# Altium PCB Motor Controller.PcbDoc (part 1 of 2)
Units mil, origin at the board's own origin, x right, y up, seen from the top; angles counter-clockwise.
Board outline 1811.02 x 1811.02 mil, 4 copper layers (Top Layer, Mid-Layer 1, Mid-Layer 2, Bottom Layer); 65 components, 62 nets, 262 pads, 173 vias.
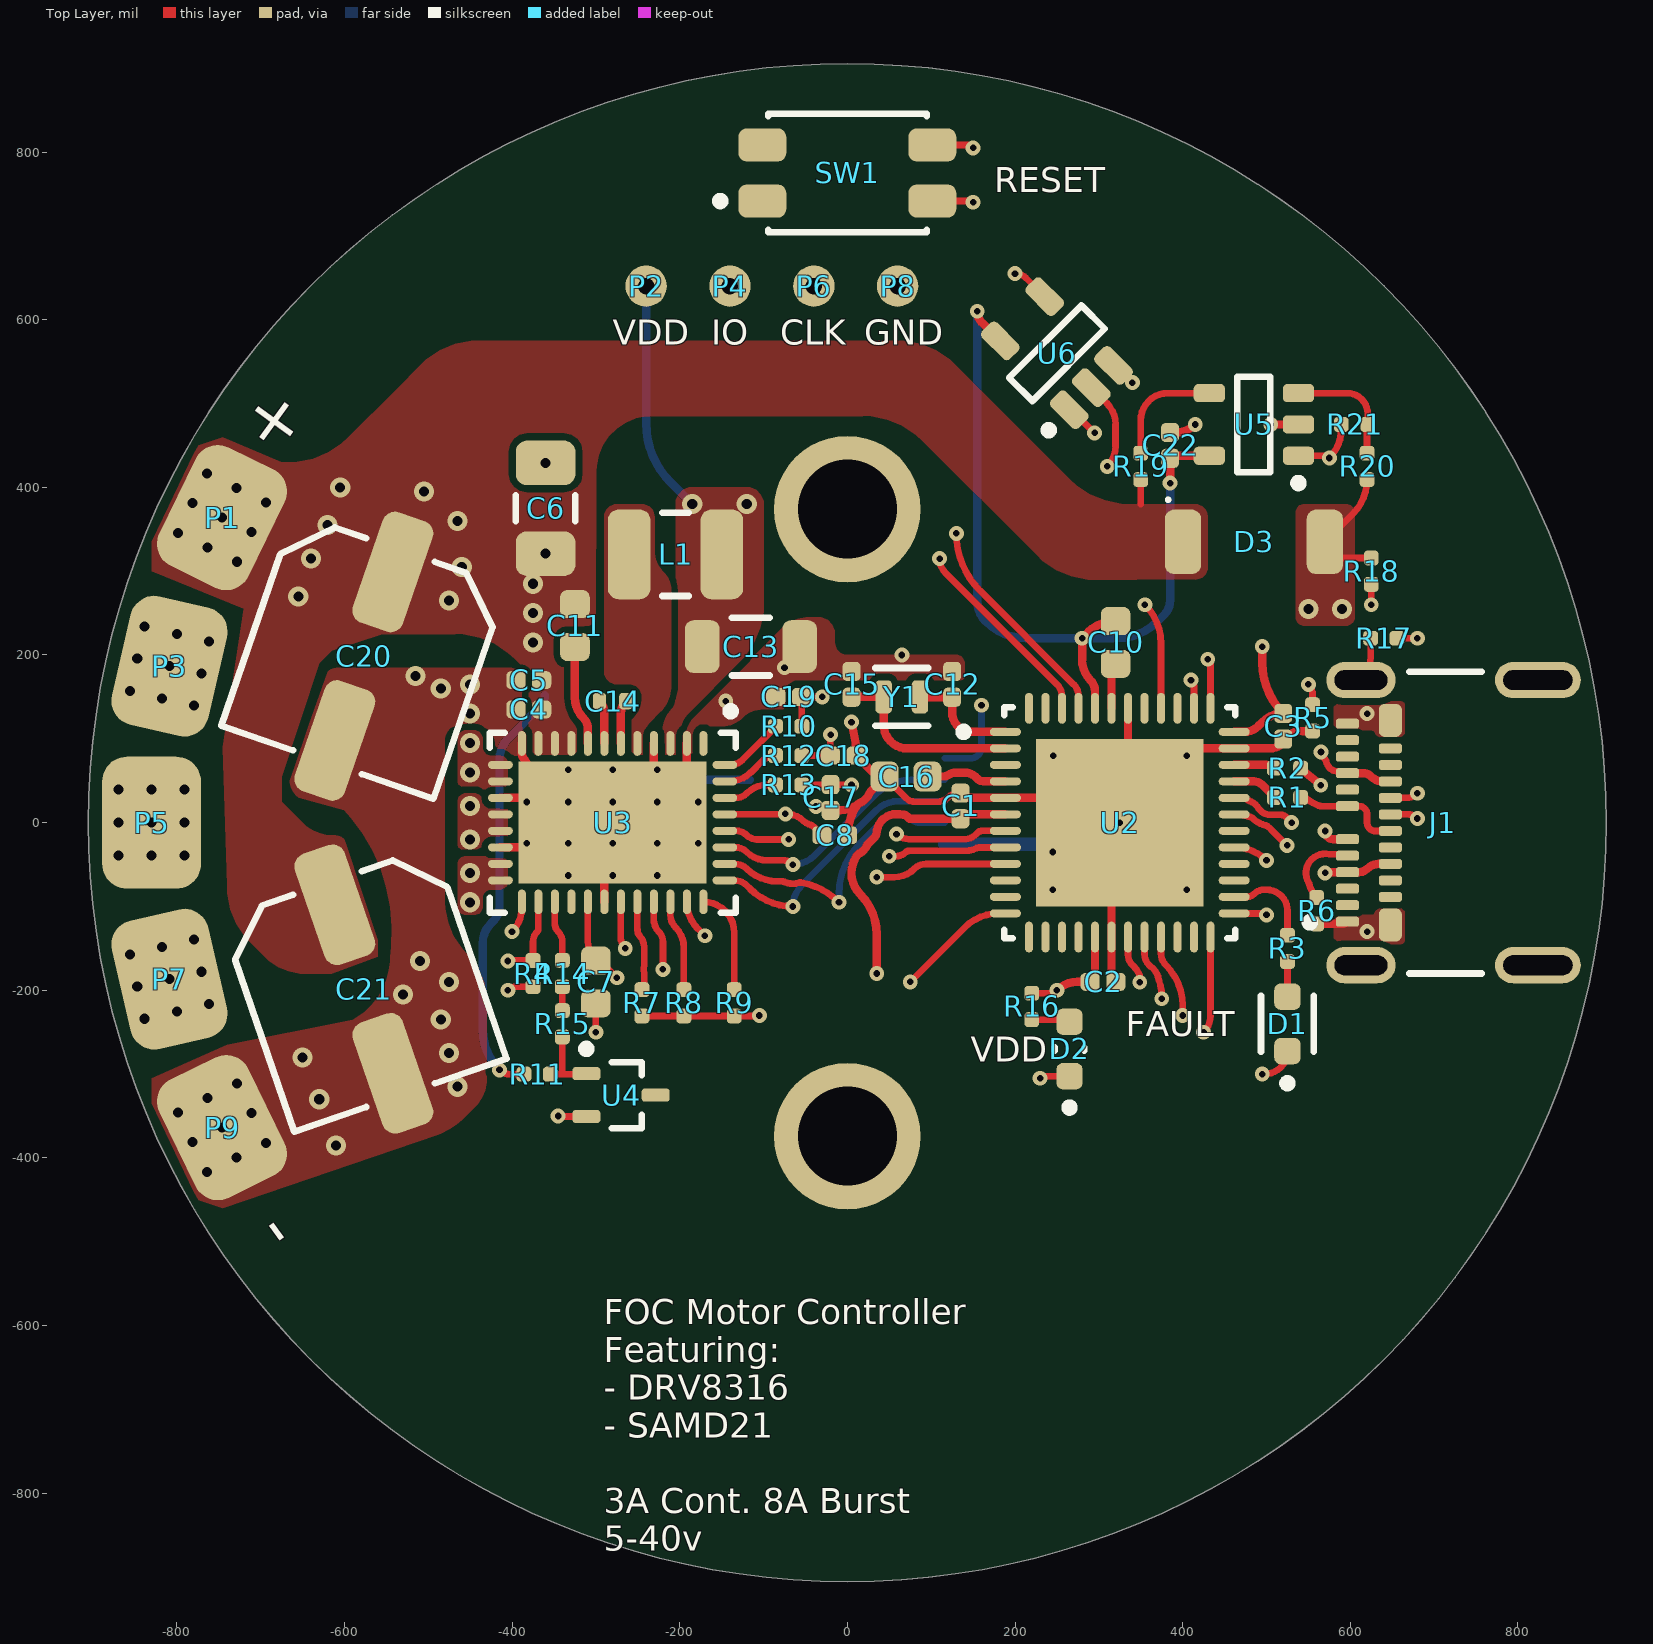
[diagram p0: Top Layer view]
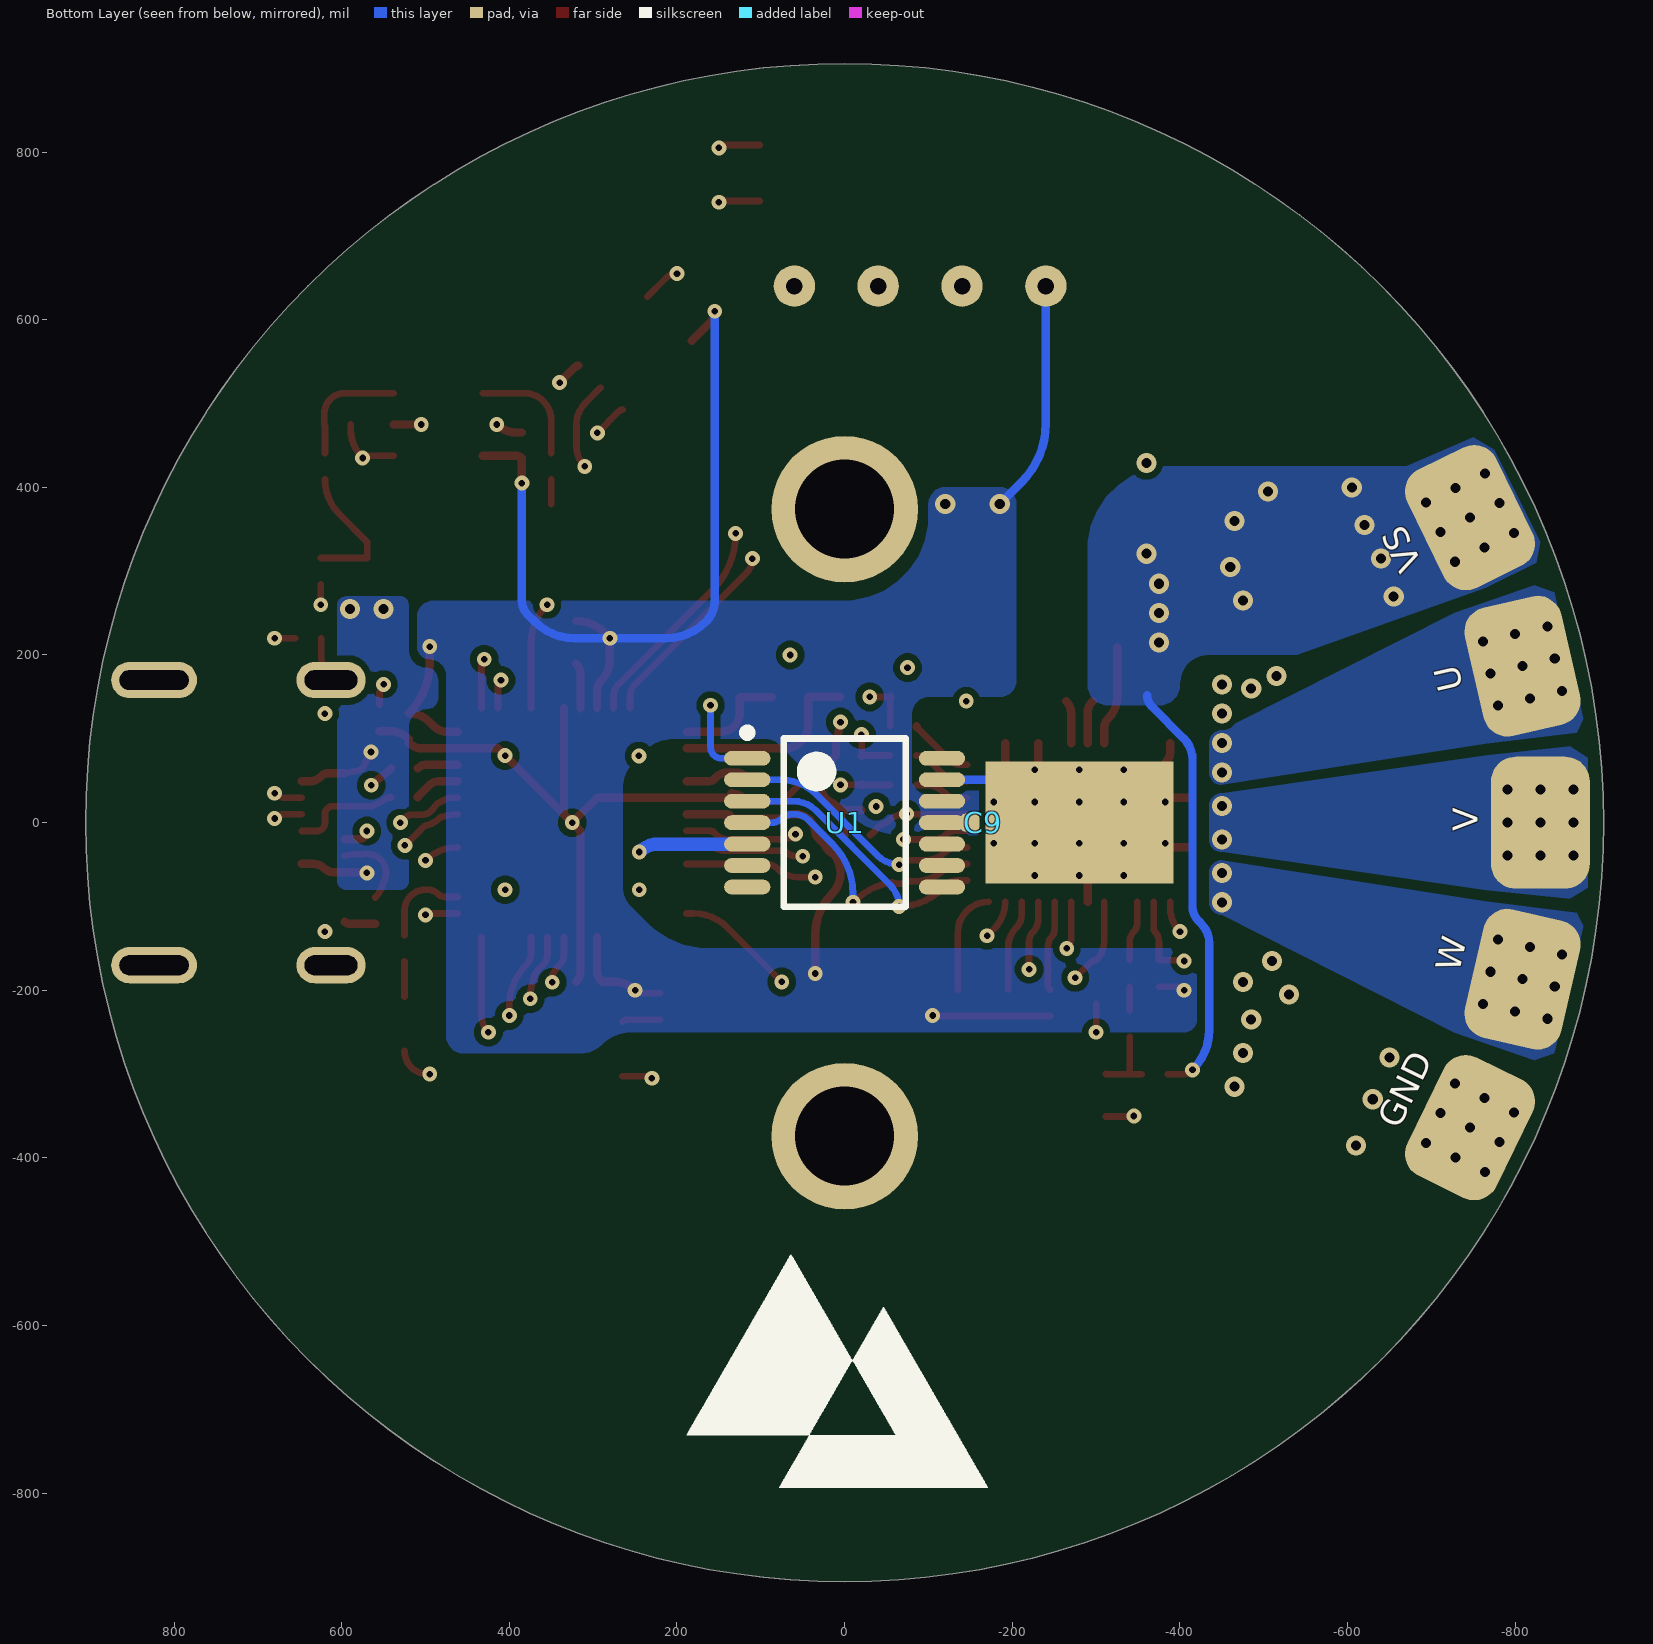
[diagram p1: Bottom Layer view, seen from below]
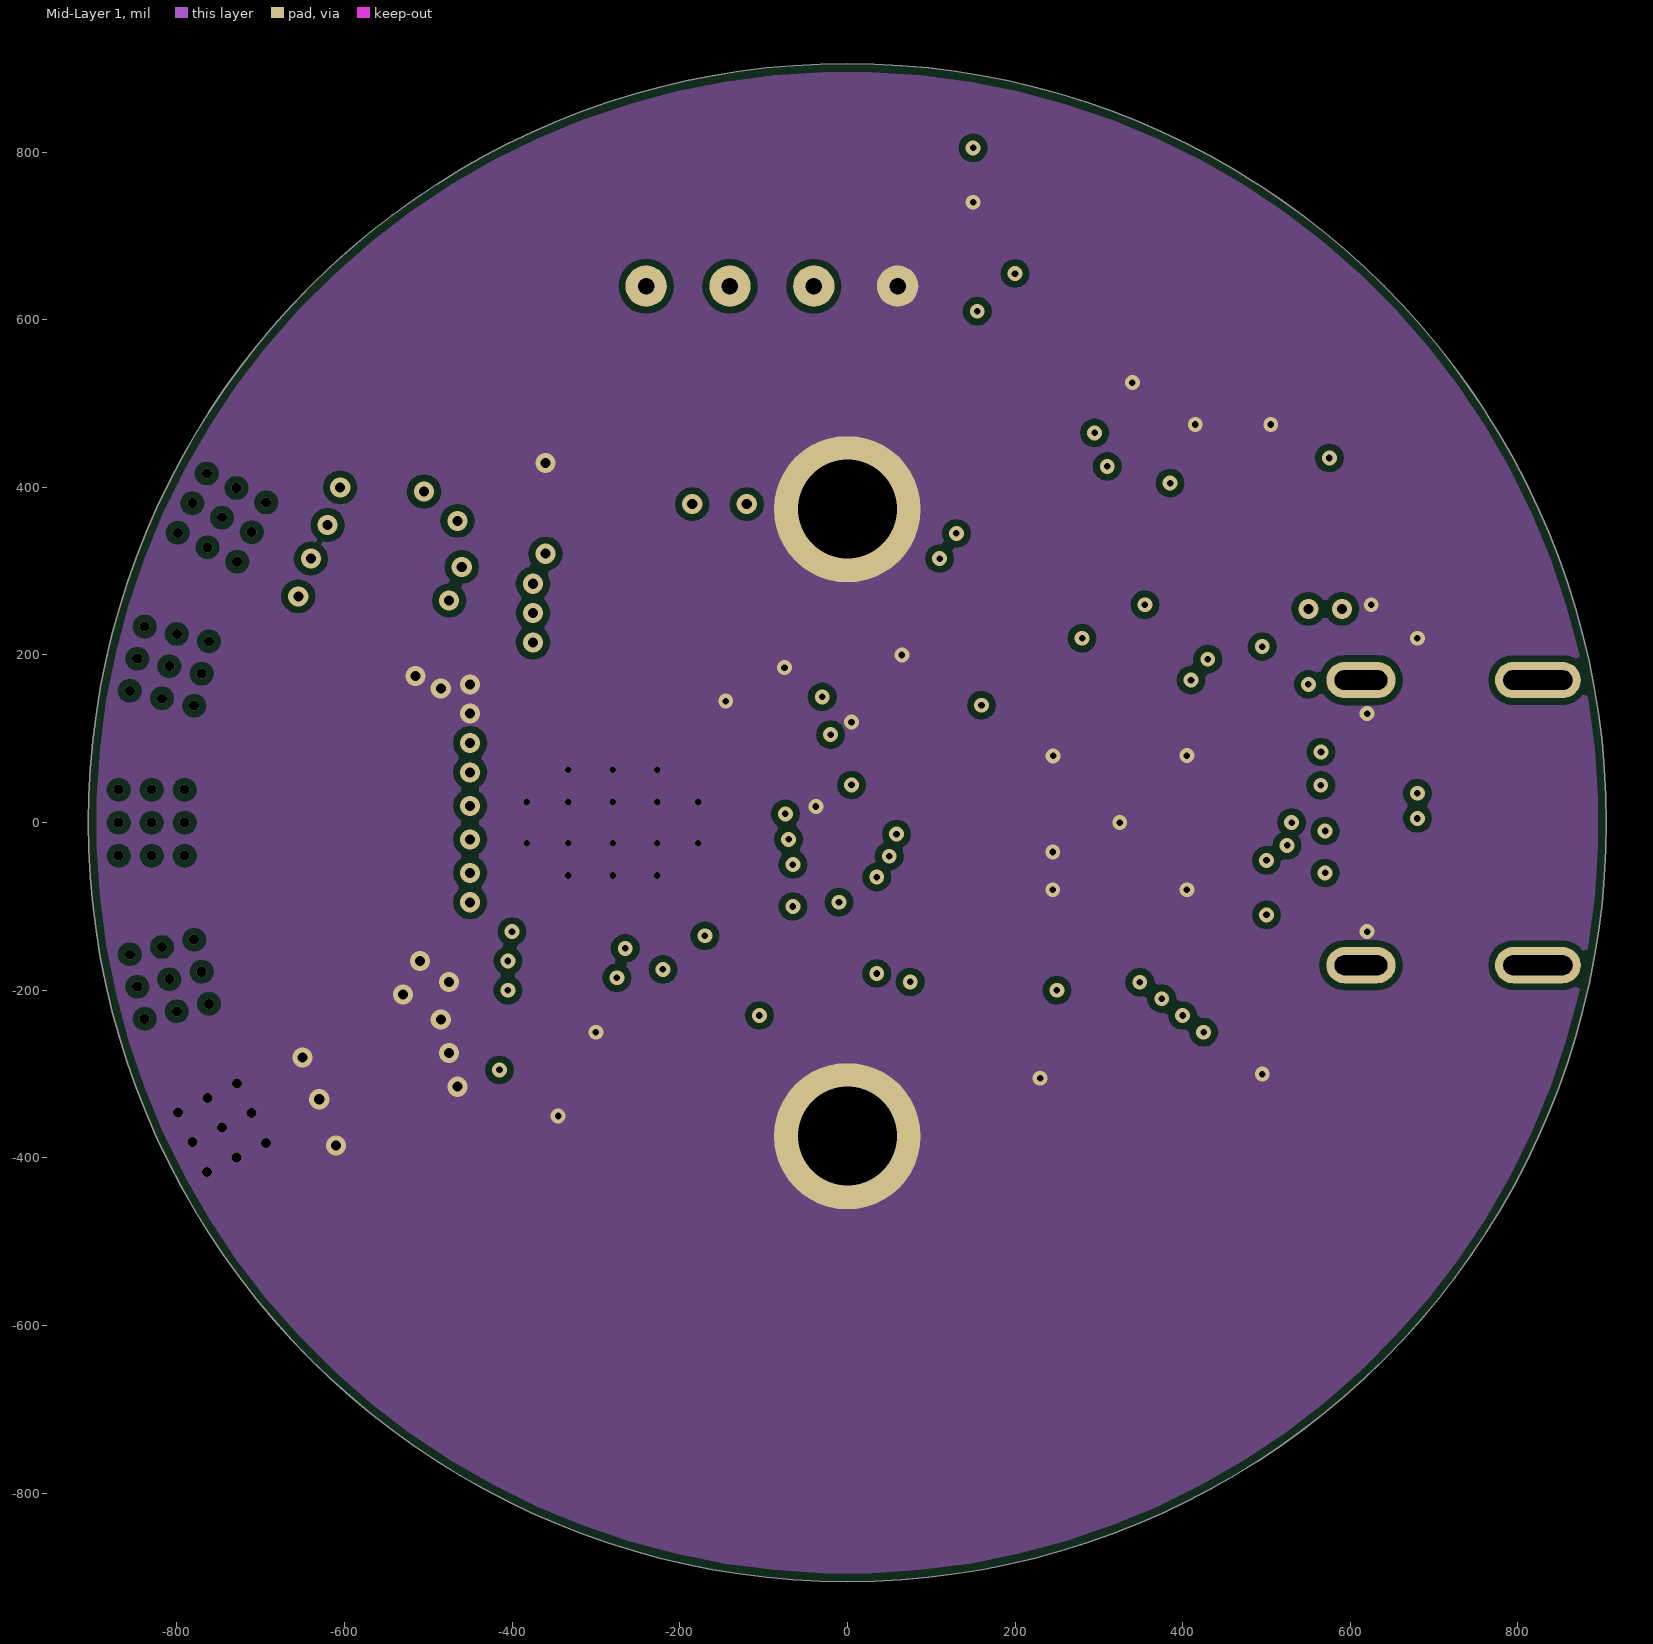
[diagram p2: Mid-Layer 1]
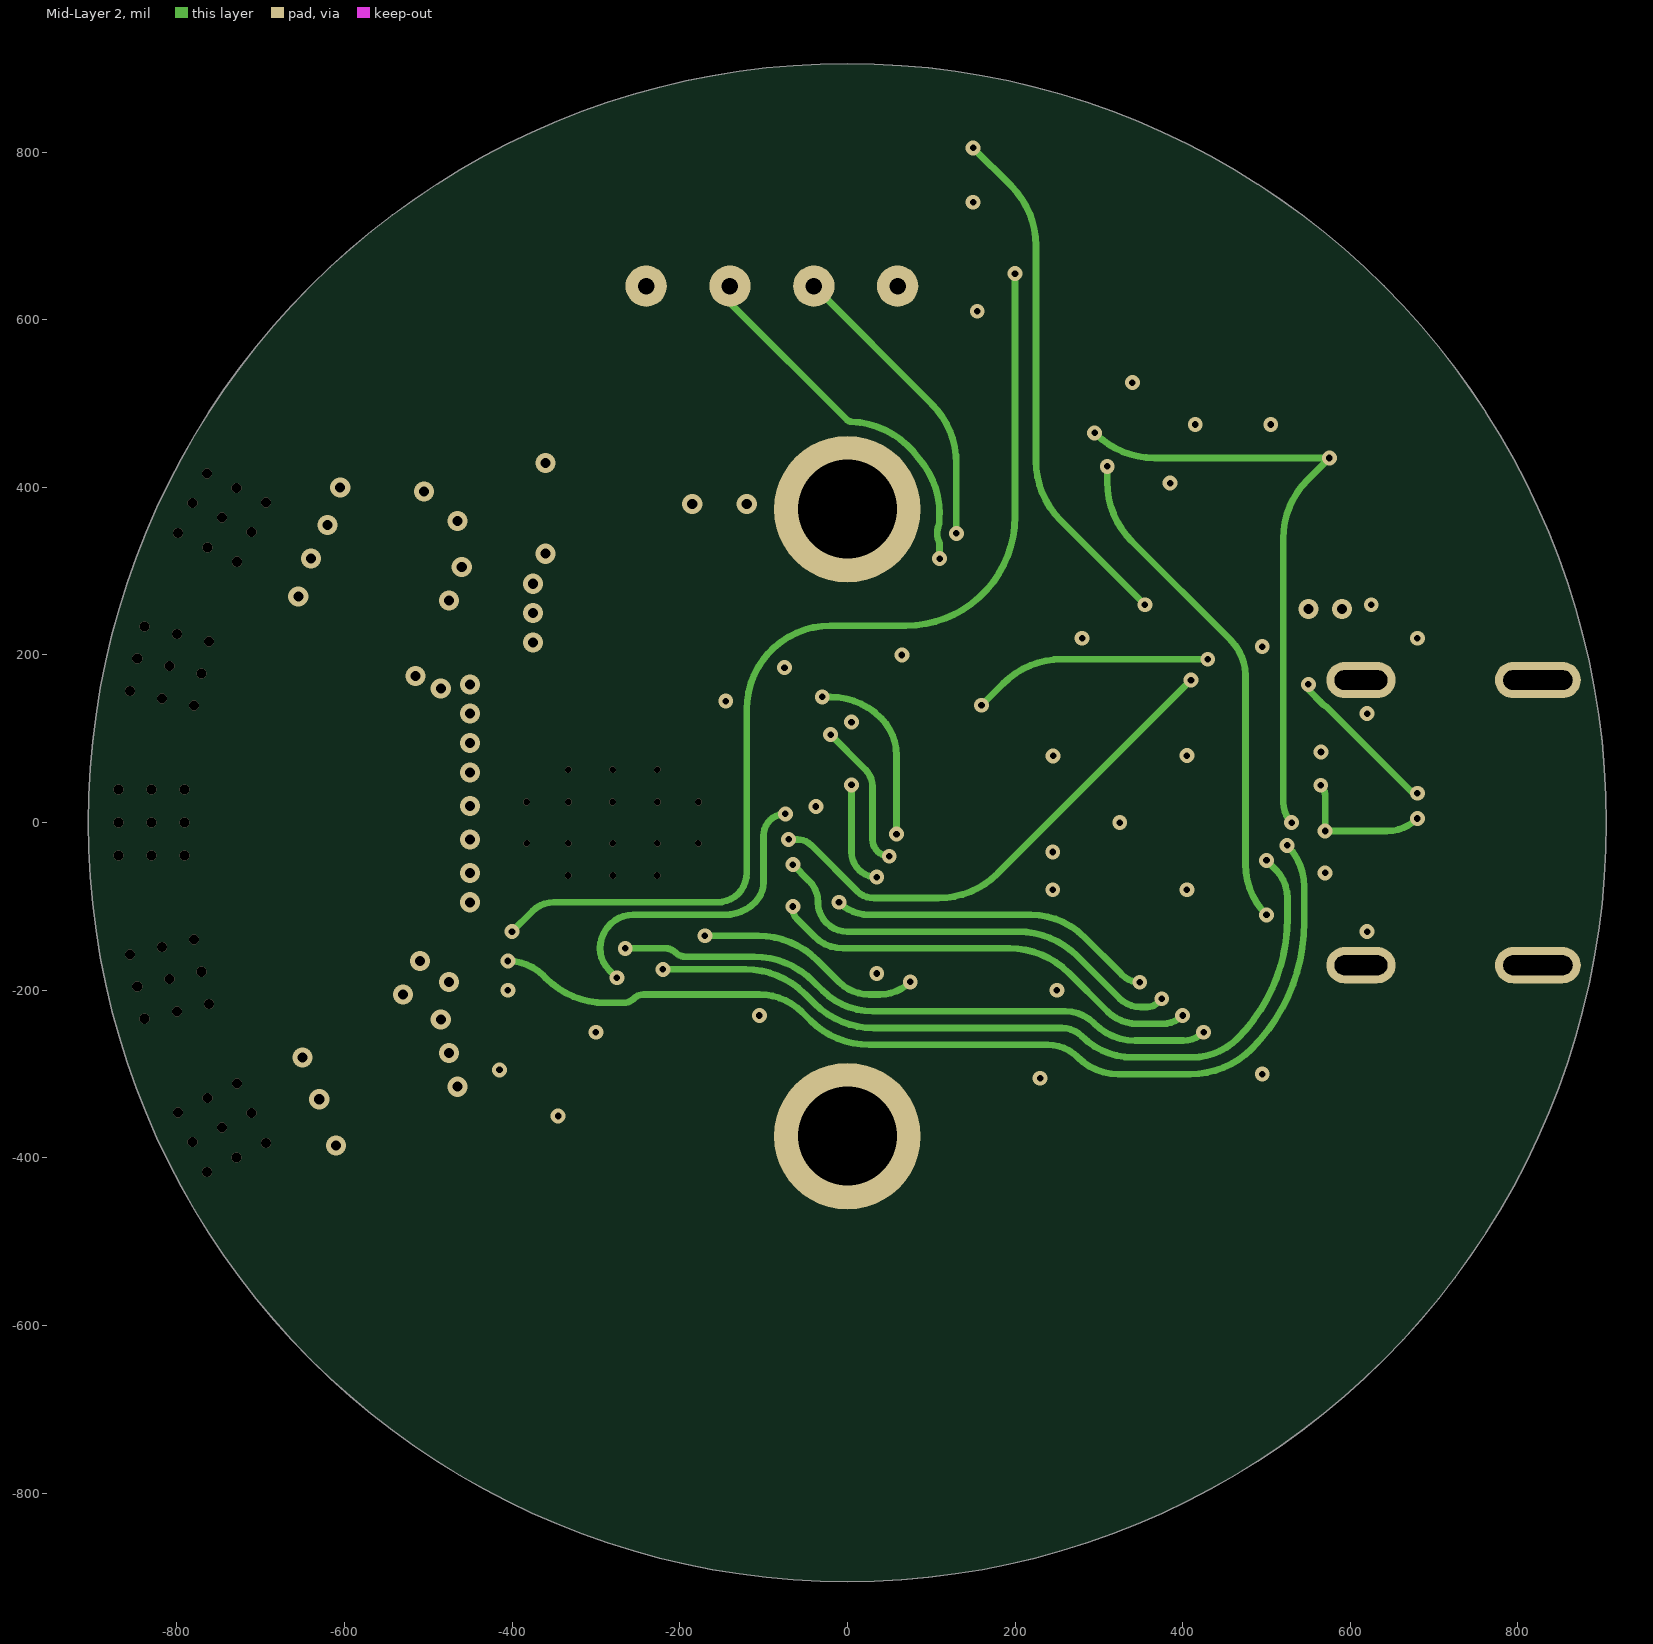
[diagram p3: Mid-Layer 2]
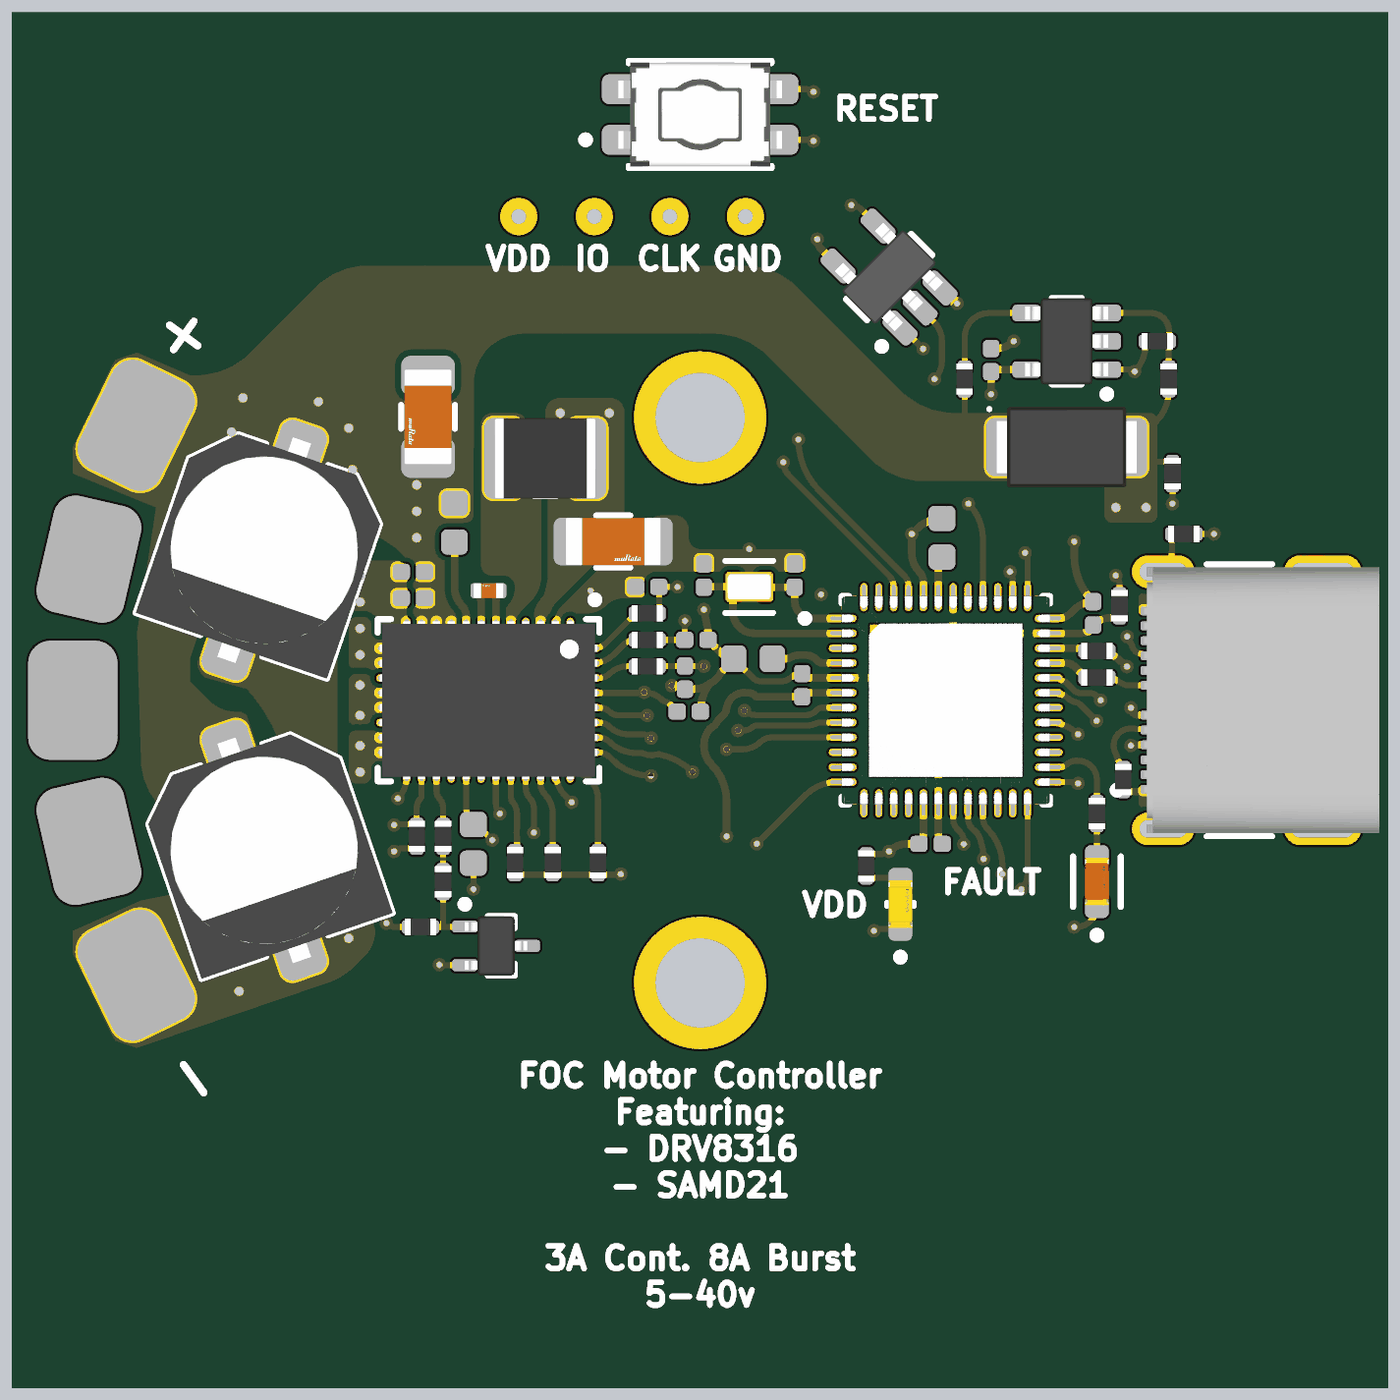
[diagram p4: 3D render of the assembled board from above, using the file's embedded part models]

## Layer stack, top to bottom
Top Solder: solder mask 0.4, Solder Resist, Dk 3.5
Top Layer: signal copper 1.4
Dielectric 1: dielectric 12.6, FR-4, Dk 4.8
Mid-Layer 1: signal copper 1.4
Dielectric3: dielectric 12.6, FR-4, Dk 4.8
Mid-Layer 2: signal copper 1.4
Dielectric2: dielectric 12.6, FR-4, Dk 4.8
Bottom Layer: signal copper 1.4
Bottom Solder: solder mask 0.4, Solder Resist, Dk 3.5

## Board outline
-905.51,0 ccw(c0,0) 0,-905.51 ccw(c0,0) 905.51,0 ccw(c0,0) 0,905.51 ccw(c0,0)

## Design rules (kind name [scope] priority, off if disabled: settings)
BoardOutlineClearance [All] p1: gap=10 ignorepadtopadclearanceinfootprint=FALSE except(0: Arc-SplitContinuation Track-SplitContinuation SMDPad-SplitContinuation THPad-SplitContinuation Via-SplitContinuation Fill-SplitContinuation Poly-SplitContinuation Region-SplitContinuation Text-SplitContinuation)
Clearance [All] p1: gap=8 ignorepadtopadclearanceinfootprint=TRUE except(5: Arc-Arc Arc-Track Track-Track SMDPad-SMDPad; 7.87: Arc-SMDPad Track-SMDPad; 10: Arc-Via Track-Via Via-Via; 12.99: Arc-THPad Track-THPad)
DiffPairsRouting [All] p1: maxlimit=10 minlimit=8 mostfreqgap=10 toplayer_minwidth=8 toplayer_maxwidth=16 toplayer_prefwidth=10 midlayer1_mingap=10 midlayer1_minwidth=15 midlayer1_maxwidth=15 midlayer1_prefwidth=15 midlayer2_mingap=10 midlayer2_minwidth=15 midlayer2_maxwidth=15 midlayer2_prefwidth=15 bottomlayer_minwidth=8 bottomlayer_maxwidth=16 bottomlayer_prefwidth=10 maxuncoupledlength=500
HoleSize [All] p1: absolutevalues=TRUE maxlimit=248 minlimit=7.87 maxpercent=80.000 minpercent=20.000
HoleToHoleClearance [All] p1: gap=19.68 allowstackedmicrovias=TRUE
MinimumAnnularRing [All] p1: minimumring=4.5
PolygonConnect [All] p1: connectstyle=Direct reliefconductorwidth=10 reliefentries=4 polygonreliefangle="90 Angle" airgapwidth=10
RoutingVias [All] p1: holewidth=7.87 width=17.72 viastyle="Through Hole" minholewidth=7.87 minwidth=17.72 maxholewidth=28 maxwidth=50
SilkToSolderMaskClearance [IsPad] p1: minsilkscreentomaskgap=6 clearancetoexposedcopper=TRUE
SolderMaskExpansion [All] p1: expansion=3 istentingtop=FALSE
UnRoutedNet [All] p1: checkbadconnections=TRUE
Width [All] p1: maxlimit=30 minlimit=5 preferedwidth=10 midlayer1_maxwidth=10 midlayer2_maxwidth=10 minimp=50.000000 maximp=50.000000 favimp=50.000000
25 further rules are at their usual default settings.

## Classes and differential pairs
differential pair USB: +USB_P -USB_N

## Components (designator, comment, footprint, x,y, rotation, side; value= is the part's Value field where it differs from the comment)
C1 "100nF" 0402CAP 135,20 r270 top
C2 "100nF" 0402CAP 305,-190 r180 top
C3 "100nF" 0402CAP 520,115 r90 top
C4 "100nF" 0402CAP -380,135 r0 top
C5 "100nF" 0402CAP -380,170 r0 top
C6 "10uF" FP-GRT31C-0_2-IPC_B -360,375 r270 top
C7 "1uF" 0603CAP -300,-190 r90 top
C8 "100nF" 0402CAP -15,-15 r180 top
C9 "100nF" 0402CAP -165,0 r0 bottom
C10 "1uF" 0603CAP 320,215 r90 top
C11 "1uF" 0603CAP -325,235 r90 top
C12 "22pF" 0402CAP 125,165 r270 top
C13 "22uF" FP-GRM319-0_15-MFG -115,210 r0 top
C14 "47nF" FP-GRM155-0_05-MFG -280,145 r180 top
C15 "22pF" 0402CAP 5,165 r270 top
C16 "1uF" 0603CAP 70,55 r0 top
C17 "22pF" 0402CAP -20,30 r90 top
C18 "22pF" 0402CAP -5,80 r180 top
C19 "22pF" 0402CAP -70,150 r0 top
C20 "47 uF" CAPAE7866X61N -576.77,198.6 r251 top locked
C21 "47 uF" CAPAE7866X61N -576.77,-198.6 r289 top locked
C22 "100nF" 0402CAP 385,450 r270 top
D1 "Red" FP-APT1608LSECK-J3-PRV-MFG 525,-240 r90 top
D2 "Green" FP-APT1608MGC-MFG 265,-270 r90 top
D3 "PMEG40T20EPX" SODFL470X110-2N 485,335 r0 top
J1 "USB C" FP-1054500101-MFG 745,0 r90 top locked
L1 "47uH" INDC3225X25N -205,320 r180 top
P1 "Power Pad" "Power Pad" -746,363.85 r244 top
P2 "Small PTH Pad" "Small PTH Pad" -240,640 r0 top
P3 "Power Pad" "Power Pad" -808.73,186.71 r257 top
P4 "Small PTH Pad" "Small PTH Pad" -140,640 r0 top
P5 "Power Pad" "Power Pad" -830,0 r270 top
P6 "Small PTH Pad" "Small PTH Pad" -40,640 r0 top
P7 "Power Pad" "Power Pad" -808.73,-186.71 r283 top
P8 "Small PTH Pad" "Small PTH Pad" 60,640 r0 top
P9 "Power Pad" "Power Pad" -746,-363.85 r296 top
R1 "27" RESC1005X40X25LL05T05 525,30 r0 top
R2 "27" RESC1005X40X25LL05T05 525,65 r0 top
R3 "750" RESC1005X40X25LL05T05 525,-150 r270 top
R4 "5.1k" RESC1005X40X25LL05T05 -375,-180 r90 top
R5 "5.1k" RESC1005X40X25LL05T05 555,125 r270 top
R6 "5.1k" RESC1005X40X25LL05T05 560,-105 r270 top
R7 "5.1k" RESC1005X40X25LL05T05 -245,-215 r90 top
R8 "5.1k" RESC1005X40X25LL05T05 -195,-215 r90 top
R9 "5.1k" RESC1005X40X25LL05T05 -135,-215 r90 top
R10 "330" RESC1005X40X25LL05T05 -70,115 r0 top
R11 "2.7k" RESC1005X40X25LL05T05 -370,-300 r180 top
R12 "330" RESC1005X40X25LL05T05 -70,80 r0 top
R13 "330" RESC1005X40X25LL05T05 -70,45 r0 top
R14 "5.1k" RESC1005X40X25LL05T05 -340,-180 r270 top
R15 "5.1k" RESC1005X40X25LL05T05 -340,-240 r270 top
R16 "604" RESC1005X40X25LL05T05 220,-219.25 r90 top
R17 "100k" RESC1005X40X25LL05T05 640,220 r180 top
R18 "5.1k" RESC1005X40X25LL05T05 625,300 r90 top
R19 "5.1k" RESC1005X40X25LL05T05 350,425 r270 top
R20 "5.1k" RESC1005X40X25LL05T05 620,425 r270 top
R21 "100k" RESC1005X40X25LL05T05 605,475 r180 top
SW1 "EVQ-P2402M" EVQ-P2402M 0,775 r90 top
U1 "AS5047D-ATSM" TSOP65P640X120-14N 0,0 r180 bottom locked
U2 "ATSAMD21G18A-MF" QFN-48 325,0 r0 top locked
U3 "DRV8316" QFN50P500X700X100_HS-41L -280,0 r270 top locked
U4 "LM4040D33FTA" SOT65P210X100-3N -270,-325 r0 top
U5 "LT1716CS5#TRMPBF" SOT95P280X100-5N 485,475 r180 top
U6 "OR" DBV0005A_M 250,560 r135 top
Y1 "32.768 kHz" ABS05W-32.768KHZ-D-2-T 65,150 r0 top

## Footprints (in the part's own frame and the unit in brackets; to place one, negate y for a bottom-side part, rotate by r counter-clockwise, add the part's x,y. Pads: shape width x height; smd on the part's side, far side on the other; paste and mask are expansions set on the pad)
0402CAP [mm] "0402 Capacitor"
  rrect50% 0.58x0.54 smd: 1(-0.39,0) 2(0.39,0)
  body extent -0.55,-0.3 0.55,0.3, height 0.56
0603CAP [mm] "0603 Capacitor"
  rrect50% 0.85x0.9 smd: 1(-0.65,0) 2(0.65,0)
  body extent -0.88,-0.48 0.87,0.48, height 0.9
ABS05W-32.768KHZ-D-2-T [mm]
  rrect50% 0.5x1 smd paste+0: 1(-0.55,0) 2(0.55,0)
  silkscreen extent -0.8,-0.87 0.8,0.87, body extent -0.95,-0.65 0.95,0.65, height 0.25
CAPAE7866X61N [mm] "Aluminum Electrolytic Capacitor, Body 6.60x6.60x6.10mm, IPC Medium Density"
  rrect50% 3.55x1.6 smd: 1(-2.7,0) 2(2.7,0)
  silkscreen extent -3.4,-3.4 3.4,3.4, body extent -3.9,-3.4 3.9,3.4, height 6.1
DBV0005A_M [mm] "SOT23, 5-Leads, Body 3.05x1.75mm, Pitch 0.95mm, IPC Low Density"
  rrect50% 1.2x0.65 smd: 1(-1.475,0.95) 2(-1.475,0) 3(-1.475,-0.95) 4(1.475,-0.95) 5(1.475,0.95)
  silkscreen extent -1.6,-1.55 0.5,1.95, body extent -1.42,-1.46 1.42,1.46, height 1.08
EVQ-P2402M [mm] "Tactile Switch"
  rrect50% 1x1.45 smd paste+0: 1(-0.85,2.575) 2(0.85,2.575) 3(-0.85,-2.575) 4(0.85,-2.575)
  silkscreen extent -1.8,-2.4 1.8,3.97, body extent -1.9,-3.4 1.9,3.4, height 0.25
FP-1054500101-MFG [mm]
  rrect100% 1.1x2.1 hole 1.6 slot 0.6 at 0 deg: 1(-4.32,3.36) 2(4.32,3.36)
  rrect100% 1.1x2.6 hole 2.1 slot 0.6 at 0 deg: 3(-4.32,-2) 4(4.32,-2)
  rrect50% 0.3x0.7 smd: A1(-3,3.77) A2(-2.5,3.77) A3(-2,3.77) A4(-1.5,3.77) A5(-1,3.77) A6(-0.5,3.77) A7(0.5,3.77) A8(1,3.77) A9(1.5,3.77) A10(2,3.77) A11(2.5,3.77) A12(3,3.77) B2(2.25,2.47) B3(1.75,2.47) B4(1.25,2.47) B5(0.75,2.47) B6(0.25,2.47) B7(-0.25,2.47) B8(-0.75,2.47) B9(-1.25,2.47) B10(-1.75,2.47) B11(-2.25,2.47)
  rrect50% 1x0.7 smd: B1(3.1,2.47) B12(-3.1,2.47)
  silkscreen extent -4.57,-0.3 4.57,5.03, body extent -4.47,-3.9 4.47,4, height 3.23
FP-APT1608LSECK-J3-PRV-MFG [mm]
  rrect50% 0.8x0.8 smd paste+0: 1(-0.825,0) 2(0.825,0)
  silkscreen extent -1.92,-0.8 0.85,0.8, body extent -1.33,-0.55 1.33,0.55, height 0.25
FP-APT1608MGC-MFG [mm]
  rrect50% 0.8x0.8 smd paste+0 mask+0: 1(-0.825,0) 2(0.825,0)
  silkscreen extent -1.9,-0.45 0.05,0.45, body extent -1.33,-0.55 1.33,0.55, height 0.25
FP-GRM155-0_05-MFG [mm]
  rrect50% 0.4x0.5 smd paste+0 mask+0: 1(-0.4,0) 2(0.4,0)
  body extent -0.7,-0.38 0.7,0.38, height 0.25
FP-GRM319-0_15-MFG [mm]
  rrect50% 1.05x1.6 smd paste+0 mask+0: 1(-1.475,0) 2(1.475,0)
  silkscreen extent -0.58,-0.87 0.58,0.87, body extent -2.1,-0.97 2.1,0.97, height 0.25
FP-GRT31C-0_2-IPC_B [mil]
  rrect50% 53.33x71.11 smd paste+0 mask+0: 1(-54.16,0) 2(54.16,0)
  silkscreen extent -16,-36 16,36, body extent -91,-45 91,45, height 10
INDC3225X25N [mm] "Chip Inductor, 2-Leads, Body 3.20x2.50mm, IPC Medium Density"
  rrect50% 1.29x2.72 smd: 1(-1.405,0) 2(1.405,0)
  silkscreen extent -0.4,-1.26 0.4,1.26, body extent -1.7,-1.35 1.7,1.35, height 2.5
"Power Pad" [mm]
  rrect50% 4x3 smd: 1(0,0)
  rrect50% 4x3 smd far side: 1(0,0)
QFN50P500X700X100_HS-41L [mm] "QFN, 40-Leads, Body 5.00x7.00mm, Pitch 0.50mm, Thermal Pad 3.70x5.70mm, IPC High Density"
  oval 0.75x0.25 smd paste-0.05 mask+0.07: 1(-2.4,2.75) 2(-2.4,2.25) 3(-2.4,1.75) 4(-2.4,1.25) 5(-2.4,0.75) 6(-2.4,0.25) 7(-2.4,-0.25) 8(-2.4,-0.75) 9(-2.4,-1.25) 10(-2.4,-1.75) 11(-2.4,-2.25) 12(-2.4,-2.75) 21(2.4,-2.75) 22(2.4,-2.25) 23(2.4,-1.75) 24(2.4,-1.25) 25(2.4,-0.75) 26(2.4,-0.25) 27(2.4,0.25) 28(2.4,0.75) 29(2.4,1.25) 30(2.4,1.75) 31(2.4,2.25) 32(2.4,2.75)
  oval 0.25x0.75 smd paste-0.05 mask+0.07: 13(-1.75,-3.4) 14(-1.25,-3.4) 15(-0.75,-3.4) 16(-0.25,-3.4) 17(0.25,-3.4) 18(0.75,-3.4) 19(1.25,-3.4) 20(1.75,-3.4) 33(1.75,3.4) 34(1.25,3.4) 35(0.75,3.4) 36(0.25,3.4) 37(-0.25,3.4) 38(-0.75,3.4) 39(-1.25,3.4) 40(-1.75,3.4)
  rect 3.7x5.7 smd paste-2.85 mask+0.07: 41(0,0)
  rect 3.7x5.7 smd far side paste-2.85 mask+0.102: 42(0,0)
  silkscreen extent -3.5,-3.72 2.73,3.73, body extent -2.66,-3.65 2.66,3.65, height 1
QFN-48 [mm] "ATSAMD21G18A-M Footprint"
  oval 0.94x0.239 smd paste-0.051: 1(-3.465,2.75) 2(-3.465,2.25) 3(-3.465,1.75) 4(-3.465,1.25) 5(-3.465,0.75) 6(-3.465,0.25) 7(-3.465,-0.25) 8(-3.465,-0.75) 9(-3.465,-1.25) 10(-3.465,-1.75) 11(-3.465,-2.25) 12(-3.465,-2.75) 25(3.466,-2.75) 26(3.466,-2.25) 27(3.466,-1.75) 28(3.466,-1.25) 29(3.466,-0.75) 30(3.466,-0.25) 31(3.466,0.25) 32(3.466,0.75) 33(3.466,1.25) 34(3.466,1.75) 35(3.466,2.25) 36(3.466,2.75)
  oval 0.239x0.94 smd paste-0.051: 13(-2.75,-3.465) 14(-2.25,-3.465) 15(-1.75,-3.465) 16(-1.25,-3.465) 17(-0.75,-3.465) 18(-0.25,-3.465) 19(0.25,-3.465) 20(0.75,-3.465) 21(1.25,-3.465) 22(1.75,-3.465) 23(2.25,-3.465) 24(2.75,-3.465) 37(2.75,3.466) 38(2.25,3.466) 39(1.75,3.466) 40(1.25,3.466) 41(0.75,3.466) 42(0.25,3.466) 43(-0.25,3.466) 44(-0.75,3.466) 45(-1.25,3.466) 46(-1.75,3.466) 47(-2.25,3.466) 48(-2.75,3.466)
  rect 5.08x5.08 smd paste-1000: 49(0,0)
  silkscreen extent -4.86,-3.5 3.5,3.5, body extent -4.44,-4.44 4.44,4.44, height 0.25
RESC1005X40X25LL05T05 [mm] "Chip Resistor, 2-Leads, Body 1.05x0.55mm, IPC High Density"
  rrect50% 0.45x0.45 smd: 1(-0.4,0) 2(0.4,0)
  body extent -0.53,-0.28 0.53,0.28, height 0.4
"Small PTH Pad" [mm]
  round 1.25 hole 0.5: 1(0,0)
SODFL470X110-2N [mm] "SODFL, 2-Leads, Body 2.50x4.70mm, IPC Medium Density"
  rrect50% 1.1x1.95 smd: 1(-2.15,0) 2(2.15,0)
  silkscreen extent -2.65,1.23 -2.55,1.32, body extent -2.35,-1.35 2.35,1.35, height 1.1
SOT65P210X100-3N [mm] "SOT23, 3-Leads, Body 2.00x2.10mm, Pitch 0.65mm, IPC Medium Density"
  rrect50% 0.85x0.4 smd: 1(-1.05,0.65) 2(-1.05,-0.65) 3(1.05,0)
  silkscreen extent -1.17,-1 0.63,1.52, body extent -1.05,-1 1.05,1, height 1
SOT95P280X100-5N [mm] "SOT23, 5-Leads, Body 2.90x2.80mm, Pitch 0.95mm, IPC Medium Density"
  rrect50% 0.95x0.55 smd: 1(-1.35,0.95) 2(-1.35,0) 3(-1.35,-0.95) 4(1.35,-0.95) 5(1.35,0.95)
  silkscreen extent -1.48,-1.45 0.5,1.9, body extent -1.4,-1.45 1.4,1.45, height 1
TSOP65P640X120-14N [mm] "TSOP, 14-Leads, Body 5.00x4.40mm, Pitch 0.65mm, IPC Medium Density"
  oval 1.4x0.45 smd: 1(-2.95,1.95) 2(-2.95,1.3) 3(-2.95,0.65) 4(-2.95,0) 5(-2.95,-0.65) 6(-2.95,-1.3) 7(-2.95,-1.95) 8(2.95,-1.95) 9(2.95,-1.3) 10(2.95,-0.65) 11(2.95,0) 12(2.95,0.65) 13(2.95,1.3) 14(2.95,1.95)
  silkscreen extent -3.08,-2.55 1.85,2.85, body extent -3.2,-2.55 3.2,2.55, height 1.2

## Part data
C1 C2 C3 C4 C5 C8 C9 C22: library part GCM155R71H104KE02D, Supplier Part Number 1=490-10672-1-ND, Supplier 1=Digi-Key
C6: library part GRT31CR61H106ME01L, Supplier Part Number 1=490-12457-1-ND, Supplier 1=Digi-Key
C7 C10 C11 C16: library part GRT188R61H105ME13D, Supplier Part Number 1=490-12331-1-ND, Supplier 1=Digi-Key
C12 C15 C17 C18 C19: library part C0402C220J5GAC7411, Supplier Part Number 1=399-C0402C220J5GAC7411CT-ND, Supplier 1=Digi-Key
C13: library part GRM319R61C226ME15D, "Multilayer Ceramic Capacitors 22uF ±10% 16V X7R SMD 1210", Case Code (Imperial)=1210, Case Code (Metric)=3225, Dielectric=X7R, Dielectric Material=Ceramic, Max Operating Temperature=125°C, Min Operating Temperature=-55°C, Package Quantity=1, Supplier Part Number 1=490-12763-1-ND, Tolerance=10%, Voltage=16V, Capacitance=22uF, Case/Package=1210, Construction=Flat, Depth=2.5mm, Height=2.5mm, Lead Free="Lead Free", Length=3.2mm, Mount="Surface Mount", Number of Pins=2, Packaging="Tape and Reel", Radiation Hardening=No, REACH SVHC="No SVHC", Resistor Type=Ceramic, RoHS Compliant=Yes, Series=C, Supplier 1=Digi-Key, Termination=SMD/SMT, Thickness=0.11inch, Voltage Rating=16V, Voltage Rating (DC)=16V, Weight=0.000564oz, Width=0.098inch
C14: library part GRM155R71H473KE14D, "Chip Capacitor, 47 nF, +/- 10%, 50 V, -55 to 125 degC, 0402 (1005 Metric), RoHS, Tape and Reel", Capacitance=0.047µF, Manufacturer=TDK, Operating Temperature=-55°C~125°C, Package / Case=0402(1005Metric), Package Description="2-Pin Surface Mount Device, Body 1 x 0.5 mm", Package Reference=1005, PCN Part Number=MLCCPartNumberChange30/Nov/2012, Ratings=-, Standard Package=1, Supplier Part Number 1=490-10702-1-ND, Temperature Coefficient=X7R, Tolerance=±10%, Voltage - Rated=50V, Applications=GeneralPurpose, Category=Capacitors, Datasheet URL=https://product.tdk.com/info/en/catalog/datasheets/mlcc_commercial_general_en.pdf, Datasheet Version=08/2016, Family=CeramicCapacitors, Features=-, Height - Seated (Max)=-, Kits=445-9021-KIT-ND-KITMLCC100PF-10UF04026.3-50V445-173086-KIT-ND-C0402-2220X7R6.3-50V1,000PF-, Lead Spacing=-, Lead Style=-, Manufacturer URL=http://www.tdk.com/, Mounting Technology=SurfaceMount, Mounting Type=SurfaceMount,MLCC, Online Catalog=CSeries,GeneralPurpose, Other Names=445-7336-1, Packaging=CutTape(CT), Product Training Modules=CSeriesGeneralApplicationsSEAT,CCV,andTVCLDesignToolsGuidetoReplacinganElectrolyticCapacitorwithanMLCC, RoHS Information=RoHSCertificate-MLCC, Series=C, Size / Dimension="0.039\"Lx0.020\"W(1.00mmx0.50mm)", Supplier 1=Digi-Key, Thickness (Max)="0.022\"(0.55mm)"
C20 C21: library part EEE-FT1H470AL, Supplier Part Number 1=10-EEE-FT1H470ALCT-ND, Supplier 1=Digi-Key
D1: library part APT1608LSECK/J3-PRV, "LED RED CLEAR 2SMD", Case Code (Imperial)=0603, Case Code (Metric)=1608, Forward Voltage=1.8V, Lens Color=Colorless, Supplier Part Number 1=754-1930-1-ND, Test Current=2mA, Case/Package=0603, Color=Red, Dominant Wavelength=625nm, Height=0.75mm, Length=1.6mm, Lens Transparency=Clear, Luminous Intensity=40mcd, Mount="Surface Mount", Packaging="Tape and Reel", Supplier 1=Digi-Key, Viewing Angle=120°, Width=0.8mm
D2: library part APT1608MGC, "LED GREEN CLEAR CHIP SMD", Case Code (Imperial)=0603, Case Code (Metric)=1608, Forward Current=20mA, Forward Voltage=2.1V, Lens Color=Clear, Max Operating Temperature=85°C, Min Operating Temperature=-40°C, Package Quantity=2000, Supplier Part Number 1=754-1118-1-ND, Case/Package=0603, Color=Green, Dominant Wavelength=570nm, Height=0.75mm, Illumination Color=Green, Lead Free="Lead Free", Length=1.6mm, Lens Style=Clear, Luminous Intensity=70mcd, Mount="Surface Mount", Packaging="Tape and Reel", Supplier 1=Digi-Key, Test Current=20mA, Viewing Angle=120°, Width=0.8mm
D3: Supplier Part Number 1=1727-7480-1-ND, Supplier 1=Digi-Key
J1: library part 1054500101, "CONN RCP USB3.1 TYPEC 24P SMD RA", Current Rating=0.25/1.25/5A, Manufacturer=Molex, Package=0, Supplier Part Number 1=WM12856CT-ND, Temperature="-30°C to +85°C", Temperature Range High=+85°C, Temperature Range Low=-30°C, Voltage Rating=30V, Automotive=No, Category=Conn, ComponentLink2Description=Datasheet, ComponentLink2URL=https://www.molex.com/webdocs/datasheets/pdf/en-us/1054500101_IO_CONNECTORS.pdf, Conn Orientation="Right Angle", Contact Material=Gold,Nickel, Device Class L1=Connectors, Device Class L2="USB Connectors", Device Class L3=unset, Digikey Description="CONN RCP USB3.1 TYPEC 24P SMD RA", Footprint Url=https://www.molex.com/pdm_docs/sd/1054500101_sd.pdf, Height=3.44mm, Is Female=yes, Lead Free=Yes, Manufacturer Part Number=1054500101, Mouser Description="USB Shielded I/O Receptacle; Type C; Right Angle; Surface Mount; Gold over Nickel", Number of Contacts=24, Octopart=https://octopart.com/105450-0101-molex-68082325, Pitch=0.5mm, RoHS=TRUE, Shielding=true, Supplier 1=Digi-Key, Usb Standard="USB 3.1"
L1: library part L1210R470KDWIT, Supplier Part Number 1=50AC9370, Supplier 1=Newark
R1 R2: library part ERJ2RKD27R0X, Supplier Part Number 1=8072299, Supplier 1=RSComponents
R3: library part ERJ-2RKF7500X, Supplier Part Number 1=P750LCT-ND, Supplier 1=Digi-Key
R4 R5 R6 R7 R8 R9 R14 R15 R18 R19 R20: library part ERJ-2RKF5101X, "PANASONIC - ERJ2RKF5101X - SMD Chip Resistor, 0402 [1005 Metric], 5.1 kohm, ERJ2R Series, 50 V, Thick Film, 100 mW", Case Code (Imperial)=0402, Case Code (Metric)=1005, Max Operating Temperature="155 degC", Min Operating Temperature="-55 degC", Package Quantity=1, PartNumber=ERJ-2RKF4701X, Power Rating="100 mW", Resistance="4.7 KOhm", Supplier Part Number 1=P5.10KLCT-ND, Tolerance=1%, Voltage Rating="50 V", Case\/Package=0402, ComponentLink1Description="Manufacturer URL", ComponentLink1URL=http://www.panasonic.com/, ComponentLink2Description=Datasheet, ComponentLink2URL=http://industrial.panasonic.com/cdbs/www-data/pdf/RDA0000/AOA0000C86.pdf, DatasheetVersion=04/2015, Height="0.35 mm", Length="1 mm", Mount="Surface Mount", Mounting Technology="Surface Mount", PackageDescription="2-Pin Surface Mount Device, Body 1 x 0.5 mm", PackageReference=0402, Packaging="Cut Tape", Pins=2, Radiation Hardening=No, REACH SVHC=Yes, RoHSCompliant=true, Supplier 1=Digi-Key, Width="0.5 mm"
R10 R12 R13: library part ERJ2RKF3300X, Manufacturer=Panasonic, Part Number=ERJ2RKF3300X
R11: library part ERJ2RKF2701X, Manufacturer=Panasonic, Part Number=ERJ2RKF2701X, Supplier 1=Digi-Key
R16: library part ERJ-2RKF6040X, Manufacturer=Panasonic, Supplier Part Number 1=P604LCT-ND, Part Number=ERJ-2RKF6040X, Supplier 1=Digi-Key
R17 R21: library part ERJ2RHD1003X, Supplier Part Number 1=85Y7989, Supplier 1=Newark
SW1: Supplier Part Number 1=P11080SCT-ND, Supplier 1=Digi-Key
U1: Supplier Part Number 1=AS5047D-ATSMCT-ND, Supplier 1=Digi-Key
U4: Supplier Part Number 1=621-LM4040D33FTA, Supplier 1=Mouser
U5: "SOT-23, 44 V, Over-the-Top, Micropower, Precision Rail-to-Rail Comparator, 1 Channel, 2.7 to 44 V, 0 to +70 degC, 5-pin Plastic TSOT-23 (S5), Mini Tape and Reel", Generic Part Number=LT1716, Manufacturer="Linear Technology", Supplier Part Number 1=LT1716CS5#TRMPBFCT-ND, Supply Current (uA) Typical=50, Supply Voltage Range="2.7 to 44 V", Channels (#)=1, Code_JEDEC=MO-193, ComponentLink1Description="Manufacturer URL", ComponentLink1URL=http://www.linear.com/, ComponentLink2Description=Datasheet, ComponentLink2URL=http://cds.linear.com/docs/en/datasheet/1716fa.pdf, ComponentLink3Description="Package Specification", ComponentLink3URL=http://cds.linear.com/docs/en/packaging/SOT_5_05-08-1635.pdf, DatasheetVersion="Rev A", Features="Comparator, Over-the-Top Inputs, Rail-to-Rail Out", Mounting Technology="Surface Mount", PackageDescription="5-Pin Plastic TSOT-23, Body 2.9 x 1.63 mm, Pitch 0.95 mm", PackageReference=S5, PartNumber=LT1716CS5#TRMPBF, Prop Delay (us)=3, RoHS=Y, Supplier 1=Digi-Key, Vos (mV) Guaranteed=1.6, Vos (mV) Typical=0.3, Vs Max (V)=44, Vs Min (V)=2.7
U6: library part SN74LV1T32DBVR, "Single Power Supply 2-INPUT POSITIVE OR GATE with Logic Level Shifter, DBV0005A, LARGE T&R", F @ Nom Voltage(Max)(Mhz)=50, Generic Part Number=SN74LV1T32, ICC @ Nom Voltage(Max)(mA)=0.01, Manufacturer="Texas Instruments", Operating Temperature Range(C)="-40 to 125", Rating=Catalog, Supplier Part Number 1=296-37201-1-ND, tpd @ Nom Voltage(Max)(ns)=13,7.5,5.5,7.0, Voltage(Nom)(V)=1.8,2.5,3.3,5.5, 3-State Output=Yes, Bits(#)=1, DatasheetVersion=SCLS741A, Input Type=TTL, Logic=True, Output Drive (IOL/IOH)(Max)(mA)=8/-8, Output Type=CMOS, PackageReference=DBV0005A, Schmitt Trigger=No, Special Features="1.8V to 3.3V Up Translation,3.3V to 1.8V Down Translation,5V Input Tolerant", Sub-Family="OR Gate", Supplier 1=Digi-Key, Technology Family=LV1T, VCC(Max)(V)=5.5, VCC(Min)(V)=1.6
Y1: library part ABS05W-32.768KHZ-D-2-T, "Crystal Oscillator", Supplier Part Number 1=535-14310-1-ND, Supplier 1=Digi-Key

## Free pads (board coordinates)
  round 175 hole 118.11: ""(0,-374.02) ""(0,374.02)

## Via types
v1: diameter 17.72, hole 7.87, Top Layer to Bottom Layer, tented both sides, 76 vias
v2: diameter 12, hole 12, Top Layer to Bottom Layer, 45 vias
v3: diameter 24, hole 12, Top Layer to Bottom Layer, tented both sides, 36 vias
v4: diameter 7.87, hole 7.87, Top Layer to Bottom Layer, tented both sides, 16 vias

## Nets (pads, with @x,y where several pads share a name; then routed paths per layer and width w, separated by ;. In a path a pad name is that pad's centre, name@x,y a point inside that pad or via, vN(x,y) a via of type N, cw(c..) or ccw(c..) an arc to the next point about the centre after c; other vN are vias at no path point)
\nCS: U2.38 U3.36 | length 723.5
  Top Layer w8: U3.36 -132.45,-9.84 cw(c-132.45,-27.45) -120,-15 ccw(c-107.93,-2.93) -107.93,-20 v1(-70,-20) ; v1(410,170) cw(c401.35,161.35) 413.58,161.35 U2.38
  Mid-Layer 2 w8: v1(-70,-20) -59.9,-20 cw(c-59.9,-43.91) -43,-27 11.45,-81.45 ccw(c31.97,-61.11) 32.04,-90 ; 32.08,-90 108.58,-90 ccw(c108.58,10) 179.29,-60.71 v1(410,170)
\nCS1: U1.1 U2.37 | length 449.3
  Top Layer w8: v1(430,195) cw(c422.11,187.11) 433.27,187.11 U2.37
  Mid-Layer 2 w8: v1(160,140) 185.71,165.71 cw(c256.42,95) 256.42,195 v1(430,195)
  Bottom Layer w8: U1.1 146.77,76.77 ccw(c146.77,90) 160,90 v1(160,140)
\nFAULT: R4.2 U2.31 U3.22 | length 1381.1
  Top Layer w8: v1(-405,-165) cw(c-403.19,-166.81) -403.19,-164.25 R4.2 -375,-142.07 cw(c-357.93,-142.07) -370,-130 ccw(c-373.42,-126.58) -368.58,-126.58 U3.22 ; U2.31 cw(c461.44,-53.18) 481.01,6.73 cw(c478.51,-0.87) 484.14,4.82 484.47,4.48 484.72,4.25 cw(c479.17,-1.52) 484.9,4.06 ; 484.94,4.03 485.19,3.78 ccw(c500.04,18.62) 491.41,-0.52 492.68,-1.1 ccw(c504.82,25.57) 498.34,-3.01 cw(c496.53,-10.8) 501.6,-4.61 cw(c461.44,-53.18) 506,-8.61 v1(524.56,-27.18)
  Mid-Layer 2 w8: v1(-405,-165) cw(c-405,-225.36) -362.32,-182.68 -359.29,-185.71 ccw(c-288.58,-115) -288.58,-215 -267.07,-215 ccw(c-267.07,-197.93) -255,-210 cw(c-242.93,-222.07) -242.93,-205 -105,-205 cw(c-105,-277.43) -53.79,-226.21 -44.29,-235.71 ccw(c26.42,-165) 26.42,-265 238.79,-265 cw(c238.79,-316.21) 274.96,-279.96 ccw(c323.28,-231.72) 323.34,-300 409.18,-300 ccw(c409.27,-196.58) 482.44,-269.67 ccw(c331.27,-118.58) 545,-118.58 545,-76.51 ccw(c475.23,-76.51) v1(524.56,-27.18)
\nSLEEP: R14.1 U3.23 | length 72.1
  Top Layer w8: U3.23 -348.9,-120.59 ccw(c-335.59,-120.59) -345,-130 cw(c-357.07,-142.07) -340,-142.07 R14.1
\RESET: SW1.4 U2.40 | length 799.6
  Top Layer w8: SW1.4 141.64,808.46 cw(c141.64,796.64) v1(150,805) ; v1(355,260) cw(c308.62,213.62) 374.21,213.62 U2.40
  Mid-Layer 2 w8: v1(150,805) 195.71,759.29 cw(c125,688.58) 225,688.58 225,431.42 ccw(c325,431.42) 254.29,360.71 v1(355,260)
A0: U2.3
A4: U2.10
A5: U2.47
AOUT_U: C19.2 R10.2 U2.7 | length 417.8
  Top Layer w8: C19.2 v1(-30,150) ; R10.2 C19.2@-54.25,149.05 ; v1@61.12,-15.76 cw(c73.08,0.75) v1(58.66,-13.66) ccw(c73.08,0.75) 73.08,-19.63 140.96,-19.63 ; 141,-19.63 ccw(c140.32,-1.46) 154.53,-12.8 cw(c160.74,-17.84) 160.7,-9.84 U2.7
  Top Layer w10: C19.2 cw(c-55.6,149.05) C19.2@-54.25,149.05
  Mid-Layer 2 w8: v1(-30,150) -20.36,150 cw(c-20.36,64.64) 40,125 cw(c-5.06,79.94) 58.66,79.94 v1(58.66,-13.66)
AOUT_V: C18.2 R12.2 U2.8 | length 375.8
  Top Layer w8: R12.2 C18.2 v1@-20.35,104.65 ; v1(50,-40) 57.93,-40 ccw(c57.93,-22.93) 70,-35 cw(c73.27,-38.27) 73.27,-33.64 140.32,-33.64 ccw(c140.32,-1.46) 154.51,-30.34 cw(c158.04,-37.53) 158,-29.53 U2.8
  Top Layer w10: v1@-20.35,104.65 v1(-20,105)
  Mid-Layer 2 w8: v1(-20,105) 21.41,63.59 cw(c0.86,42.93) 30,42.91 ; 30,42.87 30,-20 ccw(c50,-20) v1(50,-40)
AOUT_W: C17.2 R13.2 U2.9 | length 344.5
  Top Layer w8: R13.2 C17.2@-20.35,45 ; C17.2 v1@4.65,45.35 ; v1(35,-65) 55.86,-65 ccw(c55.86,-30.86) 80,-55 cw(c93.97,-68.97) 93.97,-49.21 U2.9
  Top Layer w10: C17.2@-20.35,45 C17.2 ; v1@4.65,45.35 v1(5,45)
  Mid-Layer 2 w8: v1(5,45) 5,-35 ccw(c35,-35) v1(35,-65)
CP: C11.1 U3.8 | length 119.1
  Top Layer w10: C11.1 -325,149.14 ccw(c-290.86,149.14) -315,125 cw(c-328.21,111.79) -309.53,111.79 U3.8
CPH: C14.2 U3.7 | length 52.1
  Top Layer w10: C14.2 cw(c-310.01,130.74) -289.84,130.74 U3.7
CPL: C14.1 U3.6 | length 52.1
  Top Layer w10: U3.6 -270.16,130.74 cw(c-249.99,130.74) C14.1
D10: U2.27
D12: U2.28
D13: R3.1 U2.26 | length 109.4
  Top Layer w8: U2.26 476.35,-88.58 ccw(c476.35,-76.35) 485,-85 cw(c497.07,-97.07) 497.07,-80 500,-80 cw(c500,-105) 525,-105 R3.1
D+: J1.A6 J1.B6 R2.2 | length 267
  Top Layer w8: J1.B6 668.31,9.84 cw(c668.31,-6.69) v1(680,5)
  Top Layer w10: R2.2 544.61,61.14 562.45,47.02 562.49,46.98 cw(c556.21,39.2) 564.39,44.95 v1(564.69,44.54) ; v1(570,-10) ccw(c580,-9.69) 579.99,-19.69 J1.A6
  Mid-Layer 2 w8: v1(564.69,44.54) cw(c551.86,31.71) 570,31.71 v1(570,-10) 643.79,-10 ccw(c643.79,41.21) v1(680,5)
D-: J1.A7 J1.B7 R1.2 | length 131.1
  Top Layer w8: R1.2 543.61,30 543.66,30 cw(c543.55,22) 548.73,28.1 549.9,27.1 ccw(c564.69,44.54) 554.59,24.03 561.8,20.5 ccw(c565.31,27.69) 565.31,19.68 J1.A7 610.31,19.68 cw(c610.31,10) 620,10 620,0 ccw(c630,0) 630,-10 647.76,-10 J1.B7
DISABLE: U2.25 U6.2 | length 749.2
  Top Layer w8: U6.2 309.39,500.61 cw(c283.79,475) 320,475 320,449.14 cw(c285.86,449.14) v1(310,425) ; U2.25 495.81,-108.27 cw(c495.81,-114.19) v1(500,-110)
  Mid-Layer 2 w8: v1(310,425) 310,406.42 ccw(c410,406.42) 339.29,335.71 457.32,217.68 cw(c414.64,175) 475,175 475,-49.64 ccw(c560.36,-49.64) v1(500,-110)
DRV_VREF: C7.2 C8.2 U3.25 U3.37 | length 606.9
  Top Layer w8: U3.25 -309.53,-141.41 ccw(c-277,-141.41) C7.2 cw(c-300,-175.06) C7.2@-292.48,-167.52 ; C7.2@-292.47,-167.53 v1(-275,-185) ; U3.37 -75.46,9.84 ccw(c-75.46,11.98) v1(-73.95,10.47) cw(c-73.95,-22.09) -55.68,4.85 cw(c-60.19,-1.75) -54.36,3.72 ccw(c-37.6,19.27) -43.72,-2.75 cw(c-45.85,-10.46) -40.18,-4.82 -36.41,-8.59 cw(c-42.1,-14.22) -36.35,-8.65 -36.35,-9.69 C8.2
  Mid-Layer 2 w8: -295,-150.04 ccw(c-258.79,-150) -284.39,-175.61 v1(-275,-185) ; -295,-150 cw(c-254.2,-150.2) -281.95,-120.29 cw(c-255.56,-148.97) -255.56,-110 -146.21,-110 ccw(c-146.21,-58.79) -110,-95 ccw(c-134.14,-70.86) -100,-70.86 -100,-15.58 cw(c-73.95,-15.58) v1(-73.95,10.47)
DRVOFF: U3.21 U6.4 | length 1333.7
  Top Layer w8: v1(-400,-130) ccw(c-428.32,-101.68) -388.27,-101.68 U3.21 ; v1(200,655) cw(c200,635.94) 213.48,649.42 U6.4
  Mid-Layer 2 w8: v1(-400,-130) -375.64,-105.64 cw(c-350,-131.21) -349.98,-95 -155,-95 ccw(c-155,-60) -120,-60 -120,135 cw(c-20,135) -20,235 69.83,235 ccw(c69.83,365.17) 200,365.17 v1(200,655)
GND: C1.1 C2.1 C3.1 C4.1 C5.1 C6.1 C7.1 C8.1 C9.1 C12.1 C13.2 C15.1 C16.1 C17.1 C18.1 C19.1 C20.2 C21.2 C22.1 D1.1 D2.1 J1.A1 J1.A12 J1.B1 J1.B12 P8.1 P9.1 pad. R5.2 R6.2 R17.1 R18.1 SW1.3 U1.5 U1.13 U2.5 U2.18 U2.35 U2.42 U2.49 U3.2 U3.4 U3.12 U3.15 U3.18 U3.26 U3.41 U3.42 U4.2 U5.2 U6.3 | length 2069.7
  Top Layer w8: v1(-345,-350) -345,-350.59 U4.2 ; v1(-300,-250) C7.1 ; C16.1 70.46,28.95 ccw(c80,38.49) 80,25 107.93,25 ccw(c107.93,42.07) 120,30 cw(c132.93,17.07) 132.93,35.35 C1.1 ; SW1.3 146.29,741.54 cw(c146.29,736.29) v1(150,740) ; v1(230,-305) cw(c236.08,-311.08) 236.08,-302.48 D2.1 ; v1(495,-300) 497.48,-300 ccw(c497.48,-272.48) D1.1 ; v1(625,260) R18.1 ; R17.1 v1(680,220)
  Top Layer w10: U3.18 -387.28,-29.53 ccw(c-387.28,-24.61) v4(-382.36,-24.61) ; U3.15 -387.28,29.53 cw(c-387.28,24.61) v4(-382.36,24.61) -382.36,68.63 ccw(c-391.37,68.63) -385,75 cw(c-377.11,82.89) -388.27,82.89 U3.12 ; U3.26 -289.84,-72.83 cw(c-280,-72.83) v4(-280,-62.99) ; U3.41 -191.42,67.84 U3.2 ; U3.4 -230.79,72.5 ccw(c-217.34,72.5) U3.41@-226.85,62.99 ; C17.1 -8.78,14.65 ccw(c-8.78,49.27) 12.31,21.8 ; C8.1 0.58,-9.69 cw(c62.99,-15) 12.31,21.8 ; v1(5,120) 10.17,93.1 cw(c0.35,91.21) 10.35,91.21 C18.1 28.95,61.4 ccw(c44.41,76.86) C16.1 ; C16.1@35.25,45.84 36.04,46.54 C16.1 ; C1.1 ccw(c140.83,35.35) 140.83,29.53 295.47,29.53 v1(325,0) ; U6.3 cw(c317.51,540.3) 319.26,545.07 321.1,543.73 cw(c315.2,535.65) 322.28,542.72 v1(340,525) ; C2.1 cw(c332.9,-177.46) 315.16,-177.46 315.16,-9.84 v1(325,0) ; U2.42 U2.49@334.84,9.84 ; C22.1 391.71,465.35 ccw(c391.71,498.29) v1(415,475) ; v1(505,475) U5.2@538.15,475 ; C3.1@520,94.65 519.65,95 cw(c504.16,110.49) 504.16,88.58 U2.35 413.58,88.58 U2.49@334.84,9.84 ; C3.1 cw(c543.19,76.46) 543.19,109.25 R5.2 ; R6.2 590.21,-120.75 ccw(c590.21,-111.74) J1.A1 ; 12.31,21.8 cw(c18.49,13.95) 14.49,23.11 ccw(c5,45) 26.84,35.4 cw(c35.98,31.33) 28.87,38.37 36.09,45.59 ccw(c28.98,52.62) 36.15,45.65 36.04,45.65 C16.1 ; v1(325,0) U2.49@334.84,9.84
  Bottom Layer w10: v4(-177.64,24.61) -177.64,51.18 U1.13
  Bottom Layer w16: U1.5 222.28,-25.59 cw(c222.28,-57.72) v1(245,-35)
  other v1: 620,-130 245,-80 405,-80 -37.6,19.27 245.43,79.57 405,80 620,130 -145,145 -75,185 65,200
  other v2: -764.13,-416.49 -728.74,-399.23 -693.35,-381.97 -781.38,-381.11 -746,-363.85 -710.61,-346.59 -798.64,-345.72 -763.26,-328.46 -727.87,-311.2
  other v3: -610,-385 -630,-330 -465,-315 -650,-280 -475,-275 -485,-235 -530,-205 -475,-190 -510,-165 -450,130 -485,160 -450,165 -515,175 -360,429.16
  other v4: -333.15,-62.99 -226.85,-62.99 -333.15,-24.61 -280,-24.61 -226.85,-24.61 -177.64,-24.61 -333.15,24.61 -280,24.61 -226.85,24.61 -333.15,62.99 -280,62.99 -226.85,62.99
IN_UH: U2.24 U3.27 | length 896.4
  Top Layer w8: U3.27 -270.16,-137.55 ccw(c-252.55,-137.55) v1(-265,-150) ; v1(425,-250) ccw(c405.04,-230.04) 433.27,-230.04 U2.24
  Mid-Layer 2 w8: v1(-265,-150) -217.07,-150 cw(c-217.07,-167.07) -205,-155 ccw(c-192.93,-142.93) -192.93,-160 -111.42,-160 cw(c-111.42,-260) -40.71,-189.29 -30,-200 ccw(c30.36,-139.64) 30.36,-225 260,-225 cw(c260,-273.28) 294.14,-239.14 295,-240 ccw(c343.28,-191.72) 343.28,-260 400.86,-260 ccw(c400.86,-225.86) v1(425,-250)
IN_UL: R7.2 U3.28 | length 107.6
  Top Layer w8: U3.28 -250.47,-124.72 ccw(c-214.72,-124.72) -249.96,-130.73 ccw(c-242.09,-129.33) -248.07,-134.65 cw(c-265,-150) -242.25,-152.19 ccw(c-234.28,-152.91) -242.28,-152.87 -242.28,-169.09 cw(c-250.28,-169.05) -242.42,-170.56 ccw(c-220,-175) -242.42,-179.44 cw(c-250.28,-180.95) -242.28,-180.91 -242.28,-194.82 R7.2
IN_VH: U2.29 U3.29 | length 1084
  Top Layer w8: U3.29 -230.79,-116.03 ccw(c-211.03,-116.03) -225,-130 cw(c-237.07,-142.07) -220,-142.07 v1(-220,-175) ; U2.29 462.64,-29.53 cw(c462.64,-82.36) v1(500,-45)
  Mid-Layer 2 w8: v1(-220,-175) -121.42,-175 cw(c-121.42,-275) -50.71,-204.29 -39.29,-215.71 ccw(c31.42,-145) 31.42,-245 255.86,-245 cw(c255.86,-279.14) 280,-255 ccw(c340.36,-194.64) 340.36,-280 411.04,-280 ccw(c411.12,-203.27) 465.41,-257.49 ccw(c321.43,-113.58) 525,-113.58 525,-90 ccw(c476.72,-90) 510.86,-55.86 v1(500,-45)
IN_VL: R8.2 U3.30 | length 109.1
  Top Layer w8: U3.30 -211.1,-110.27 ccw(c-190.27,-110.27) -205,-125 cw(c-229.14,-149.14) -195,-149.14 R8.2
IN_WH: U2.12 U3.31 | length 463.9
  Top Layer w8: U3.31 ccw(c-145.32,-94.49) -177.92,-127.08 v1(-170,-135) ; v1(75,-190) 140,-125 cw(c180.4,-165.4) 180.4,-108.27 U2.12
  Mid-Layer 2 w8: v1(-170,-135) -106.42,-135 cw(c-106.42,-235) -35.71,-164.29 -10,-190 ccw(c26.21,-153.79) 26.21,-205 38.79,-205 ccw(c38.79,-153.79) v1(75,-190)
IN_WL: R9.2 U3.32 | length 125.7
  Top Layer w8: U3.32 cw(c-171.73,-131.22) -135,-131.22 R9.2
MISO: U1.3 U2.21 U3.33 | length 951.5
  Top Layer w8: U3.33 -134.73,-68.9 cw(c-134.73,-89.73) -120,-75 -116.21,-78.79 ccw(c-65,-27.57) v1(-65,-100) ; U2.21 374.21,-156.03 ccw(c393.97,-156.03) 380,-170 cw(c331.72,-218.28) 400,-218.28 v1(400,-230)
  Mid-Layer 2 w8: v1(-65,-100) -65,-102.93 ccw(c-47.93,-102.93) -60,-115 -39.14,-135.86 ccw(c-5,-101.72) -5,-150 193.58,-150 cw(c193.58,-250) 264.29,-179.29 310.01,-225.01 ccw(c346.2,-188.82) 346.2,-240 375.86,-240 ccw(c375.86,-205.86) v1(400,-230)
  Bottom Layer w8: v1(-65,-100) cw(c-28.79,-100) -54.39,-74.39 35,15 cw(c60.57,-10.57) 60.57,25.59 U1.3
MOSI: U1.4 U2.19 U3.34 | length 792.4
  Top Layer w8: U3.34 -133.97,-49.21 cw(c-133.97,-68.97) -120,-55 ccw(c-83.79,-18.79) -83.79,-70 -77.93,-70 cw(c-77.97,-78) -74.63,-70.73 ccw(c-65,-50) -58.08,-71.79 cw(c-55.66,-79.41) -54.17,-71.55 cw(c-70.36,-155.36) v1(-10,-95) ; U2.19 334.84,-157.55 ccw(c352.45,-157.55) 339.99,-169.99 342.93,-172.93 cw(c325.86,-190) 349.52,-185.23 cw(c341.68,-186.81) v1(348.83,-190.4)
  Mid-Layer 2 w8: v1(-10,-95) ccw(c26.21,-58.79) 26.21,-110 218.73,-110 cw(c218.79,-200.14) 282.58,-136.46 325.67,-179.55 327.83,-181.71 ccw(c348.83,-160.71) v1(348.83,-190.4)
  Bottom Layer w8: v1(-10,-95) -10,-84.79 cw(c73.99,-84.79) 14.6,-25.4 42.93,2.93 cw(c60,-14.14) 60,10 62.93,10 cw(c62.93,-7.07) 75,5 ccw(c87.07,17.07) 87.07,0 U1.4
NetC10_1: C10.1 U2.43 | length 54.3
  Top Layer w10: U2.43 315.16,177.72 cw(c331.69,177.72) C10.1
NetC12_2: C12.2 U2.1 Y1.2 | length 133.6
  Top Layer w10: Y1.2 86.65,149.65 C12.2 125,131.59 ccw(c148.32,131.59) 148.32,108.27 U2.1
NetC15_2: C15.2 U2.2 Y1.1 | length 232.9
  Top Layer w10: C15.2@5,150 Y1.1 43.35,116.65 ccw(c71.42,116.65) 71.42,88.58 U2.2
NetC16_2: C16.2 U2.4 | length 97
  Top Layer w10: C16.2 114.23,55 ccw(c114.18,65) 119.66,56.63 cw(c129.69,41.46) 129.69,59.65 140.32,59.65 cw(c140.32,41.46) 154.37,53 ccw(c162.05,59.4) 160,49.62 ccw(c163.97,68.97) 163.97,49.21 U2.4
NetD1_2: D1.2 R3.2 | length 41.8
  Top Layer w8: D1.2 R3.2
NetD2_2: D2.2 R16.1 | length 45.7
  Top Layer w8: R16.1 258.92,-235 cw(c258.92,-243.6) D2.2
NetJ1_2: J1.2 R17.2 | length 53
  Top Layer w8: J1.2 ccw(c584.87,197.93) 624.25,197.93 R17.2
NetJ1_A5: J1.A5 R6.1 | length 95.2
  Top Layer w8: R6.1 556.23,-84.82 ccw(c549.53,-89.16) 556.13,-84.63 cw(c584.14,-65.11) 551.04,-73.46 ccw(c543.29,-75.45) 550.23,-71.47 cw(c570,-60) 547.65,-55.18 ccw(c539.82,-53.55) 547.69,-55.01 547.92,-53.76 cw(c555.79,-55.22) 548.62,-51.68 549.48,-49.93 cw(c570,-60) 574.82,-37.65 ccw(c576.45,-29.82) 576.41,-37.82 586.8,-37.82 J1.A5
NetJ1_B5: J1.B5 R5.1 | length 247.9
  Top Layer w8: v1(550,165) cw(c537.93,152.93) 555,152.93 R5.1 ; J1.B5 666.79,29.53 ccw(c666.79,48.21) v1(680,35) cw(c666.79,48.21) v1@678.36,33.54
  Mid-Layer 2 w8: v1(550,165) 550,161.85 ccw(c558,161.85) 552.34,156.2 564.06,144.48 cw(c558.42,138.8) 564.35,144.18 ccw(c593.03,170.08) 572.23,137.51 cw(c567.91,130.77) 573.6,136.4 671.46,38.54 ccw(c680,47.07) v1(680,35)
NetR10_1: R10.1 U3.40 | length 79
  Top Layer w8: U3.40 -139.73,68.9 ccw(c-139.73,89.73) -125,75 R10.1@-86.28,113.72
  Top Layer w10: R10.1@-86.28,113.72 ccw(c-87.55,115) R10.1
NetR11_1: R11.1 R15.2 U4.1 | length 87.3
  Top Layer w8: R11.1 -340,-300 ; R15.2 -340,-300 ; U4.1 cw(c-312.76,-297.99) -312.76,-300 -340,-300
NetR12_1: R12.1 U3.39 | length 70.6
  Top Layer w8: U3.39 -141.04,49.21 ccw(c-141.04,86.04) -115,60 -101.54,73.46 cw(c-85.75,57.66) R12.1
NetR13_1: R13.1 U3.38 | length 64.5
  Top Layer w8: U3.38 -133.21,29.53 ccw(c-133.21,48.21) -120,35 cw(c-95.86,10.86) -95.86,45 R13.1
NetR14_2: R14.2 R15.1 | length 28.5
  Top Layer w8: R15.1 R14.2
NetR19_1: R19.1 U5.4 | length 139.6
  Top Layer w8: R19.1 350,480 cw(c382.4,480) 382.4,512.4 U5.4@431.85,512.4
NetR20_1: R20.1 R21.1 U5.3 | length 143.9
  Top Layer w8: U5.3@538.15,512.4 596.18,512.4 cw(c596.18,487.84) 620.75,487.84 R21.1 ccw(c622.55,473.19) 620,473.19 R20.1
PHASE_U: P3.1 U3.13 U3.14
  other v2: -779.22,139.49 -817.58,148.35 -855.94,157.2 -770.37,177.85 -808.73,186.71 -847.09,195.57 -761.51,216.21 -799.87,225.07 -838.23,233.93
  other v3: -450,60 -450,95
PHASE_V: P5.1 U3.16 U3.17
  other v2: -869.37,-39.37 -830,-39.37 -790.63,-39.37 -869.37,0 -830,0 -790.63,0 -869.37,39.37 -830,39.37 -790.63,39.37
  other v3: -450,-20 -450,20
PHASE_W: P7.1 U3.19 U3.20
  other v2: -838.23,-233.93 -799.87,-225.07 -761.51,-216.21 -847.09,-195.57 -808.73,-186.71 -770.37,-177.85 -855.94,-157.2 -817.58,-148.35 -779.22,-139.49
  other v3: -450,-95 -450,-60
RX: U2.16
SCK: U1.2 U2.20 U3.35 | length 905.7
  Top Layer w8: U3.35 -133.21,-29.53 cw(c-133.21,-48.21) -120,-35 ccw(c-95.86,-10.86) -95.86,-45 -77.07,-45 cw(c-77.07,-62.07) v1(-65,-50) ; U2.20 354.53,-156.79 ccw(c373.21,-156.79) 360,-170 cw(c323.79,-206.21) 360.51,-170.52 ccw(c366.22,-164.91) 361.68,-171.5 cw(c348.83,-190.4) 371.42,-186.93 ccw(c379.32,-185.67) 371.8,-188.41 cw(c323.79,-206.21) 375,-206.21 v1(375,-210)
  Mid-Layer 2 w8: v1(-65,-50) -45.61,-69.39 cw(c-71.21,-95) -35,-95 ccw(c0,-95) 0,-130 203.58,-130 cw(c203.58,-230) 274.29,-159.29 324.39,-209.39 ccw(c350,-183.79) 350,-220 357.93,-220 ccw(c357.93,-202.93) 370,-215 v1(375,-210)
  Bottom Layer w8: v1(-65,-50) ccw(c-65,-13.79) -39.39,-39.39 33.54,33.54 cw(c76.14,-9.07) 76.14,51.18 U1.2
SW_BK: L1.2 U3.5
SWCLK: P6.1 U2.45 | length 625.1
  Top Layer w8: v1(130,345) ccw(c226.57,345) 158.28,276.72 270,165 cw(c256.03,151.03) 275.79,151.03 U2.45
  Mid-Layer 2 w8: P6.1 100.71,499.29 cw(c30,428.58) 130,428.58 v1(130,345)
SWDIO: P4.1 U2.46 | length 681
  Top Layer w8: v1(110,315) ccw(c134.14,315) 117.07,297.93 250,165 cw(c235.27,150.27) 256.1,150.27 U2.46
  Mid-Layer 2 w8: P4.1 -140,623.31 ccw(c-132,623.31) -137.66,617.66 -0.71,480.71 ccw(c4.91,486.4) 4.52,478.41 cw(c0,374.02) 85.26,434.42 cw(c10,368.58) 110,368.58 ccw(c117.55,365.95) 109.55,365.95 109.55,357.75 cw(c101.55,357.79) 109.17,355.35 108.17,352.22 ccw(c115.79,349.78) 107.92,351.24 107.69,349.99 cw(c99.82,351.45) 107.65,349.82 ccw(c130,345) 109.27,335.37 cw(c102,332.03) 110,332.07 v1(110,315)
TX: U2.15
USB_IN: R21.2 U2.32 U5.1 U6.1 | length 946
  Top Layer w8: U6.1 cw(c264.62,485.5) 269.55,490.45 v1(295,465) ; U2.32 469.07,29.53 cw(c469.07,14.07) 477.91,26.75 ccw(c482.44,33.35) 480.05,25.71 cw(c475.23,9.84) 488.72,19.48 ccw(c495.2,24.18) 488.82,19.35 490.85,16.67 ccw(c497.23,21.5) 491.45,15.96 493.06,14.28 ccw(c504.82,25.57) 493.46,13.88 493.88,13.47 cw(c488.3,7.74) 493.96,13.39 494.06,13.29 494.38,12.97 ccw(c500.04,18.62) 496.73,11.34 498.07,10.73 ccw(c504.82,25.57) 504.82,9.27 517.42,9.27 cw(c517.42,1.27) 523.07,6.93 v1(530,0) ; U5.1@538.15,437.6 568.73,437.6 cw(c568.73,428.73) v1(575,435) ccw(c540.59,469.41) 589.25,469.41 R21.2
  Mid-Layer 2 w8: v1(295,465) 295.71,464.29 ccw(c366.42,535) 366.42,435 v1(575,435) 549.29,409.29 ccw(c620,338.58) 520,338.7 520,24.14 ccw(c554.14,24.14) v1(530,0)
USB_N: R1.1 U2.33 | length 55.5
  Top Layer w10: U2.33 484.83,49.21 cw(c484.83,34.83) 495,45 R1.1@508.72,31.28 ; R1.1@508.73,31.27 cw(c507.45,30) R1.1
USB_P: R2.1 U2.34 | length 48.9
  Top Layer w10: U2.34 499.84,68.9 cw(c499.84,55.59) R2.1
VDD: C1.2 C2.2 C3.2 C9.2 C10.2 C13.1 C22.2 L1.1 P2.1 R4.1 R7.1 R8.1 R9.1 R16.2 U1.11 U1.12 U2.6 U2.17 U2.36 U2.44 U3.3 U5.5 U6.5 | length 2102.8
  Top Layer w8: v1(-405,-200) cw(c-394.73,-210.27) -394.73,-195.75 R4.1 ; R7.1 R8.1 R9.1 -106.81,-230.75 ccw(c-106.81,-228.19) v1(-105,-230) ; R16.2 241.54,-203.5 ccw(c241.54,-191.54) v1(250,-200)
  Top Layer w10: v1(35,-180) 35,-133.28 ccw(c-33.28,-133.28) 15,-85 cw(c39.14,-60.86) 5,-60.86 5,-60 cw(c41.21,-60) 11.26,-39.64 cw(c19.51,-45.3) 14.85,-36.45 ccw(c6.46,-20.31) 23.01,-27.86 cw(c32.08,-32.06) 24.98,-25.02 31.93,-18.07 ccw(c24.84,-11.01) 34.78,-12.16 34.91,-11.02 cw(c44.84,-12.17) 35.02,-10.32 35.22,-9.24 cw(c58.66,-13.66) 62.56,9.87 ccw(c64.15,19.75) 64.1,9.75 64.92,9.75 cw(c64.92,-0.25) 71.97,6.84 74.16,4.65 C1.2 cw(c140.2,4.65) 140.2,9.84 U2.6 ; v1(155,610) ccw(c174.06,610) 160.58,596.52 U6.5 ; v1(250,-200) cw(c274.14,-224.14) 274.14,-190 C2.2 ccw(c275.58,-175.93) 295.47,-175.93 U2.17 ; U2.44 295.47,156.79 ccw(c276.79,156.79) 290,170 cw(c314.14,194.14) 280,194.14 v1(280,220) 286.87,226.87 cw(c320,193.73) C10.2 ; v1(385,405) C22.2 cw(c392.13,427.52) 392.13,437.6 U5.5@431.85,437.6 ; U2.36 473.75,108.27 ccw(c473.75,131.25) 490,115 495,120 cw(c520,95) C3.2 cw(c580.36,190.71) 495,190.71 v1(495,210)
  Bottom Layer w10: P2.1 -240,476.42 ccw(c-140,476.42) -210.71,405.71 v3(-185,380) ; v1(155,610) 155,264.14 ccw(c189.14,264.14) 165,240 ccw(c213.28,288.28) 213.28,220 v1(280,220) 321.72,220 ccw(c321.72,288.28) 370,240 377.93,247.93 ccw(c360.86,265) 385,265 v1(385,405)
  other v3: -120,380
VS: C4.2 C5.2 C6.2 C11.2 C20.1 C21.1 D3.1 P1.1 R11.2 R19.2 U3.9 U3.10 U3.11 | length 538.1
  Top Layer w8: v1(-415,-295) ccw(c-402.93,-282.93) -402.93,-300 R11.2 ; 350,380 R19.2
  Bottom Layer w10: v1(-415,-295) cw(c-366.72,-246.72) -435,-246.72 -435,-144.14 cw(c-400.86,-144.14) -425,-120 -422.07,-117.07 ccw(c-439.14,-100) -415,-100 -415,75 cw(c-378.79,75) -404.42,100.58 -366.46,138.54 ccw(c-380.06,152.13) -360.83,152.13
  other v2: -727.87,311.2 -763.26,328.46 -798.64,345.72 -710.61,346.59 -746,363.85 -781.38,381.11 -693.35,381.97 -728.74,399.23 -764.13,416.49
  other v3: -375,215 -375,250 -475,265 -655,270 -375,285 -460,305 -640,315 -360,320.84 -620,355 -465,360 -505,395 -605,400
VUSB: D3.2 J1.A4 J1.A9 J1.B4 J1.B9 R18.2 R20.2 | length 531.2
  Top Layer w8: v1(565,84.28) 565,83.98 ccw(c573,83.98) 567.34,78.32 569.09,76.57 cw(c563.45,70.9) 571.26,72.64 ccw(c585.75,75.79) 585.75,60.96 587.38,60.96 J1.A9 ; R20.2 cw(c562.31,409.25) 603.1,368.46 D3.2 569.65,315.75 R18.2
  Top Layer w10: v1(570,-60) cw(c572.28,-62.28) 572.28,-59.06 610.21,-59.06 ccw(c610.21,-45.21) 620,-55 cw(c633.97,-68.97) 633.97,-49.21 J1.B9 ; J1.A9 615.21,59.05 ; J1.B4 J1.B4@638.97,49.21 ; 615.21,59.05 cw(c615.21,45.21) 625,55 ; 615.21,59.05 cw(c615.21,45.21) 625,55 ; 615.21,59.05 cw(c615.21,45.21) 625,55 ; 615.21,59.05 cw(c615.21,45.21) 625,55 ; 615.21,59.05 cw(c615.21,45.21) 625,55 ; 615.21,59.05 cw(c615.21,45.21) 625,55 ; 615.21,59.05 cw(c615.21,45.21) 625,55 ; 615.21,59.05 cw(c615.21,45.21) 625,55 ; 625,55 ccw(c638.97,68.97) J1.B4@638.97,49.21 ; 625,55 ccw(c638.97,68.97) J1.B4@638.97,49.21 ; 625,55 ccw(c638.97,68.97) J1.B4@638.97,49.21 ; 625,55 ccw(c638.97,68.97) J1.B4@638.97,49.21 ; 625,55 ccw(c638.97,68.97) J1.B4@638.97,49.21 ; 625,55 ccw(c638.97,68.97) J1.B4@638.97,49.21 ; 625,55 ccw(c638.97,68.97) J1.B4@638.97,49.21 ; 625,55 ccw(c638.97,68.97) J1.B4@638.97,49.21
  other v3: 550,255 590,255
pads on no net: J1.1 J1.3 J1.4 J1.A2 J1.A3 J1.A8 J1.A10 J1.A11 J1.B2 J1.B3 J1.B8 J1.B10 J1.B11 SW1.1 SW1.2 U1.6 U1.7 U1.8 U1.9 U1.10 U1.14 U2.11 U2.13 U2.14 U2.22 U2.23 U2.30 U2.39 U2.41 U2.48 U3.1 U3.24 U4.3

## Polygon pours and split planes (outlines as drawn)
GND on Top Layer "GND_L01_P002" (solid, pour order 2): 665,105 cw(c660,105) 660,100 635,100 cw(c635,105) 630,105 ccw(c625,105) 625,110 585,110 cw(c585,115) 580,115 580,140 cw(c585,140) 585,145 660,145 cw(c660,140) 665,140
GND on Top Layer "GND_L01_P001" (solid, pour order 1): 665,-105 ccw(c660,-105) 660,-100 635,-100 ccw(c635,-105) 630,-105 cw(c625,-105) 625,-110 585,-110 ccw(c585,-115) 580,-115 580,-140 ccw(c585,-140) 585,-145 660,-145 ccw(c660,-140) 665,-140
GND on Top Layer "GND_L01_P016" (solid, pour order 16): -400.71,185.03 -607.87,185.03 ccw(c-607.87,167.87) -620,180 -660,65 -665,50 ccw(c-640.86,50) -657.93,32.93 -655,30 -600,15 cw(c-758.03,-130.56) -545.18,-159.82 cw(c-630.57,-159.86) -590,-235 -740,-265 -830,-305 -830,-335 -775,-450 -745,-460 -488.15,-372.39 ccw(c-526.42,-280) -455.71,-350.71 -444.02,-339.02 ccw(c-477.85,-305.18) -430,-305.18 -430,-215.36 ccw(c-515.34,-215.35) -455,-155 cw(c-394.64,-94.64) -480,-94.64 -480,100.3 cw(c-465.3,100.3) -465.3,115 -440,115 cw(c-440,95) -420,95 ccw(c-405,95) -405,80 -389.5,80 ccw(c-389.5,89.51) -380,89.51 -380,165 ccw(c-400,165) -400,185 cw(c-400,195.03)
GND on Top Layer "GND_L01_P015" (solid, pour order 15): -79.14,230.86 cw(c-45,196.72) -45,245 -35,245 cw(c-35,225) -15,225 -15,215 ccw(c0,215) 0,200 130,200 cw(c130,190) 140,190 140,175 cw(c135,175) 135,170 -60,170 ccw(c-60,160) -70,160 -70,145 cw(c-80,145) -80,135 -100.86,135 ccw(c-100.86,100.86) -125,125 cw(c-149.14,149.14) -149.14,115 -170,115 ccw(c-170,105) -180,105 -180,92.58 cw(c-191.42,92.58) -191.42,81.16 cw(c-191.42,89.74) -200,89.74 -200,95 cw(c-163.79,95) -189.39,120.61
VS on Top Layer "Top Layer-VS" (solid, pour order 13): -390.38,189.08 -397.01,195.71 ccw(c-467.72,125) -467.72,225 -555,225 -615,205 -630,190 -675,55 -675,25 -649.14,-0.86 ccw(c-615,33.28) -615,-15 -612.07,-15 cw(c-612.07,-32.07) -600,-20 -560,-140 -560,-160 -615,-180 -646.72,-180 cw(c-646.72,-111.72) -695,-160 -711.72,-143.28 cw(c-643.43,-75) -740,-75 -745,90 -720,255 -830,300 -830,335 -775,450 -745,460 -675,430 -666.21,430 ccw(c-666.21,529.5) -595.86,459.14 -537.78,517.22 -509.29,545.71 cw(c-438.58,475) -438.58,575 -308.58,575 58.58,575 cw(c58.58,475) 129.29,545.71 265.71,409.29 ccw(c336.42,480) 336.42,380 345,380 cw(c347.49,362.67) 347.5,380.18 cw(c347.51,362.65) 350,380 415,380 cw(c415,365) 430,365 430,305 cw(c415,305) 415,290 350,290 cw(c347.5,307.48) 347.5,289.82 cw(c347.5,307.5) 345,290 296.42,290 cw(c296.42,390) 225.71,319.29 89.29,455.71 ccw(c18.58,385.01) 18.58,485 -233.58,485 ccw(c-233.58,419.14) -299.43,419.14 -299.43,336.74 cw(c-452.22,336.71) -300,323.58 -300,245 cw(c-310,245) -310,235 ccw(c-310,225) -320,225 -320,85 cw(c-330,85) -330,75 -370,75 cw(c-370,85) -380,85 -380,175.01 ccw(c-392.05,175.01) -383.54,183.54 -386.46,186.46 ccw(c-394.99,177.95)
VDD on Top Layer "VDD_L01_P012" (solid, pour order 12): -100,380 ccw(c-120,380) -120,400 -185,400 ccw(c-185,380) -205,380 -205,147.07 cw(c-222.07,147.07) -210,135 ccw(c-185.86,110.86) -220,110.86 -220,85 ccw(c-210,85) -210,75 ccw(c-210,85) -200,85 -200,105 cw(c-163.79,105) -189.39,130.61 -129.29,190.71 ccw(c-200,261.42) -100,261.42
SW_BK on Top Layer "SW_BK_L01_P011" (solid, pour order 11): -245,149.14 -245,150 ccw(c-260,150) -260,165 -275,165 cw(c-275,180) -290,180 -290,365 cw(c-275,365) -275,380 -245,380 cw(c-245,365) -230,365 -230,324.14 ccw(c-195.86,324.14) -220,300 cw(c-244.13,275.86) -210,275.86 -210,165 cw(c-258.28,165) -224.14,130.86 -235,120 ccw(c-222.93,107.93) -240,107.93 -240,85 cw(c-250,85) -250,75 cw(c-250,85) -260,85 -260,112.93 cw(c-242.93,112.93) -255,125 ccw(c-279.14,149.14)
VUSB on Top Layer "VUSB_L01_P010" (solid, pour order 10): 545,235 cw(c545,245) 535,245 535,370 cw(c545,370) 545,380 595,380 cw(c595,370) 605,370 605,245 cw(c595,245) 595,235
PHASE_U on Top Layer "PHASE_U_L01_P005" (solid, pour order 5): -415,40 -455,40 cw(c-455,50) -465,50 -465,100 cw(c-455,100) -455,110 -445,110 cw(c-445,100) -435,100 -435,90 ccw(c-425,90) -425,80 -415,80 cw(c-415,70) -405,70 -405,50 cw(c-415,50)
PHASE_V on Top Layer "PHASE_V_L01_P004" (solid, pour order 4): -430,20 cw(c-430,25) -435,25 ccw(c-445,25) -445,35 -455,35 ccw(c-455,25) -465,25 -465,-25 ccw(c-455,-25) -455,-35 -445,-35 ccw(c-445,-25) -435,-25 cw(c-430,-25) -430,-20 -410,-20 ccw(c-410,-15) -405,-15 -405,15 ccw(c-410,15) -410,20
PHASE_W on Top Layer "PHASE_W_L01_P003" (solid, pour order 3): -415,-40 -455,-40 ccw(c-455,-50) -465,-50 -465,-100 ccw(c-455,-100) -455,-110 -445,-110 ccw(c-445,-100) -435,-100 -435,-90 cw(c-425,-90) -425,-80 -415,-80 ccw(c-415,-70) -405,-70 -405,-50 ccw(c-415,-50)
VUSB on Bottom Layer "VUSB_L04_P009" (solid, pour order 9): 520,205 cw(c500,205) 500,185 ccw(c500,170) 485,170 485,150 ccw(c500,150) 500,135 cw(c500,115) 520,115 520,-70 ccw(c530,-70) 530,-80 595,-80 ccw(c595,-70) 605,-70 605,260 ccw(c595,260) 595,270 530,270 ccw(c530.03,259.97) 520,260
VDD on Bottom Layer "VDD_L04_P014" (solid, pour order 14): 510,210 cw(c495,210) 495,195 ccw(c495,175) 475,175 475,-255 cw(c455,-255) 455,-275 346.42,-275 cw(c346.42,-174.68) 345,-274.99 314.14,-275 cw(c314.14,-240.86) 290,-265 ccw(c253.79,-301.2) 253.79,-250 -405,-250 cw(c-405,-235) -420,-235 -420,-165 cw(c-405.01,-164.99) -405,-150 163.58,-150 ccw(c163.59,-50.02) 234.29,-120.71 255,-100 ccw(c230.89,-75.87) 265,-75.86 265,40 ccw(c216.75,40.01) 250.86,74.14 240,85 ccw(c203.8,48.81) 203.79,100 95,100 ccw(c94.99,75.87) 77.93,92.93 1.82,16.82 cw(c-53.03,71.48) -0.03,15.03 -0.71,14.29 cw(c-71.42,85) -71.42,-15 -155,-15 cw(c-155,-5) -165,-5 -165,30 cw(c-155,30) -155,40 -90,40 ccw(c-90,50) -80,50 -80,130 ccw(c-100,130) -100,150 -185,150 cw(c-185,170) -205,170 -205,380 cw(c-185,380) -185,400 -120,400 cw(c-120,380) -100,380 -100,365 ccw(c0,365) 0,265 490,265 cw(c490,245) 510,245
VS on Bottom Layer "VS_L04_P017" (solid, pour order 17): -400,164.99 -400,165.86 ccw(c-434.14,165.86) -410,190 ccw(c-434.14,165.86) -434.14,200 -540,200 -765,280 -825,310 -830,335 -775,445 -750,460 -670,425 -390,425 cw(c-390,325) -290,325 -290,165 cw(c-315,165) -315,140 -375,140 cw(c-375,165)
PHASE_W on Bottom Layer "PHASE_W_L04_P008" (solid, pour order 8): -435,-95 cw(c-450,-95) -450,-110 -728.05,-250.69 -822.6,-283.24 -846.44,-275.03 -881.34,-123.86 -873.44,-107.24 -764.26,-93.84 -450,-45 cw(c-450,-60) -435,-60
PHASE_V on Bottom Layer "PHASE_V_L04_P007" (solid, pour order 7): -435,20 ccw(c-450,20) -450,35 -765.78,80.49 -865.23,90.94 -886.61,77.57 -886.61,-77.57 -865.23,-90.94 -765.78,-80.49 -450,-35 ccw(c-450,-20) -435,-20
PHASE_U on Bottom Layer "PHASE_U_L04_P006" (solid, pour order 6): -435,95 ccw(c-450,95) -450,110 -728.05,250.69 -822.6,283.24 -846.44,275.03 -881.34,123.86 -873.44,107.24 -764.26,93.84 -450,45 ccw(c-450,60) -435,60